# Altium PCB PCB V1.0.PcbDoc (part 1 of 2)
Units mil, origin at the board's own origin, x right, y up, seen from the top; angles counter-clockwise.
Board outline 1377.95 x 1377.95 mil, 6 copper layers (SIG/GND1, GND1, PWR, SIG/GND2, GND2, SIG/GND3), stack 60.865 mil thick; 201 components, 101 nets, 556 pads, 512 vias.
Unrouted connection lines stored in the file: 86.
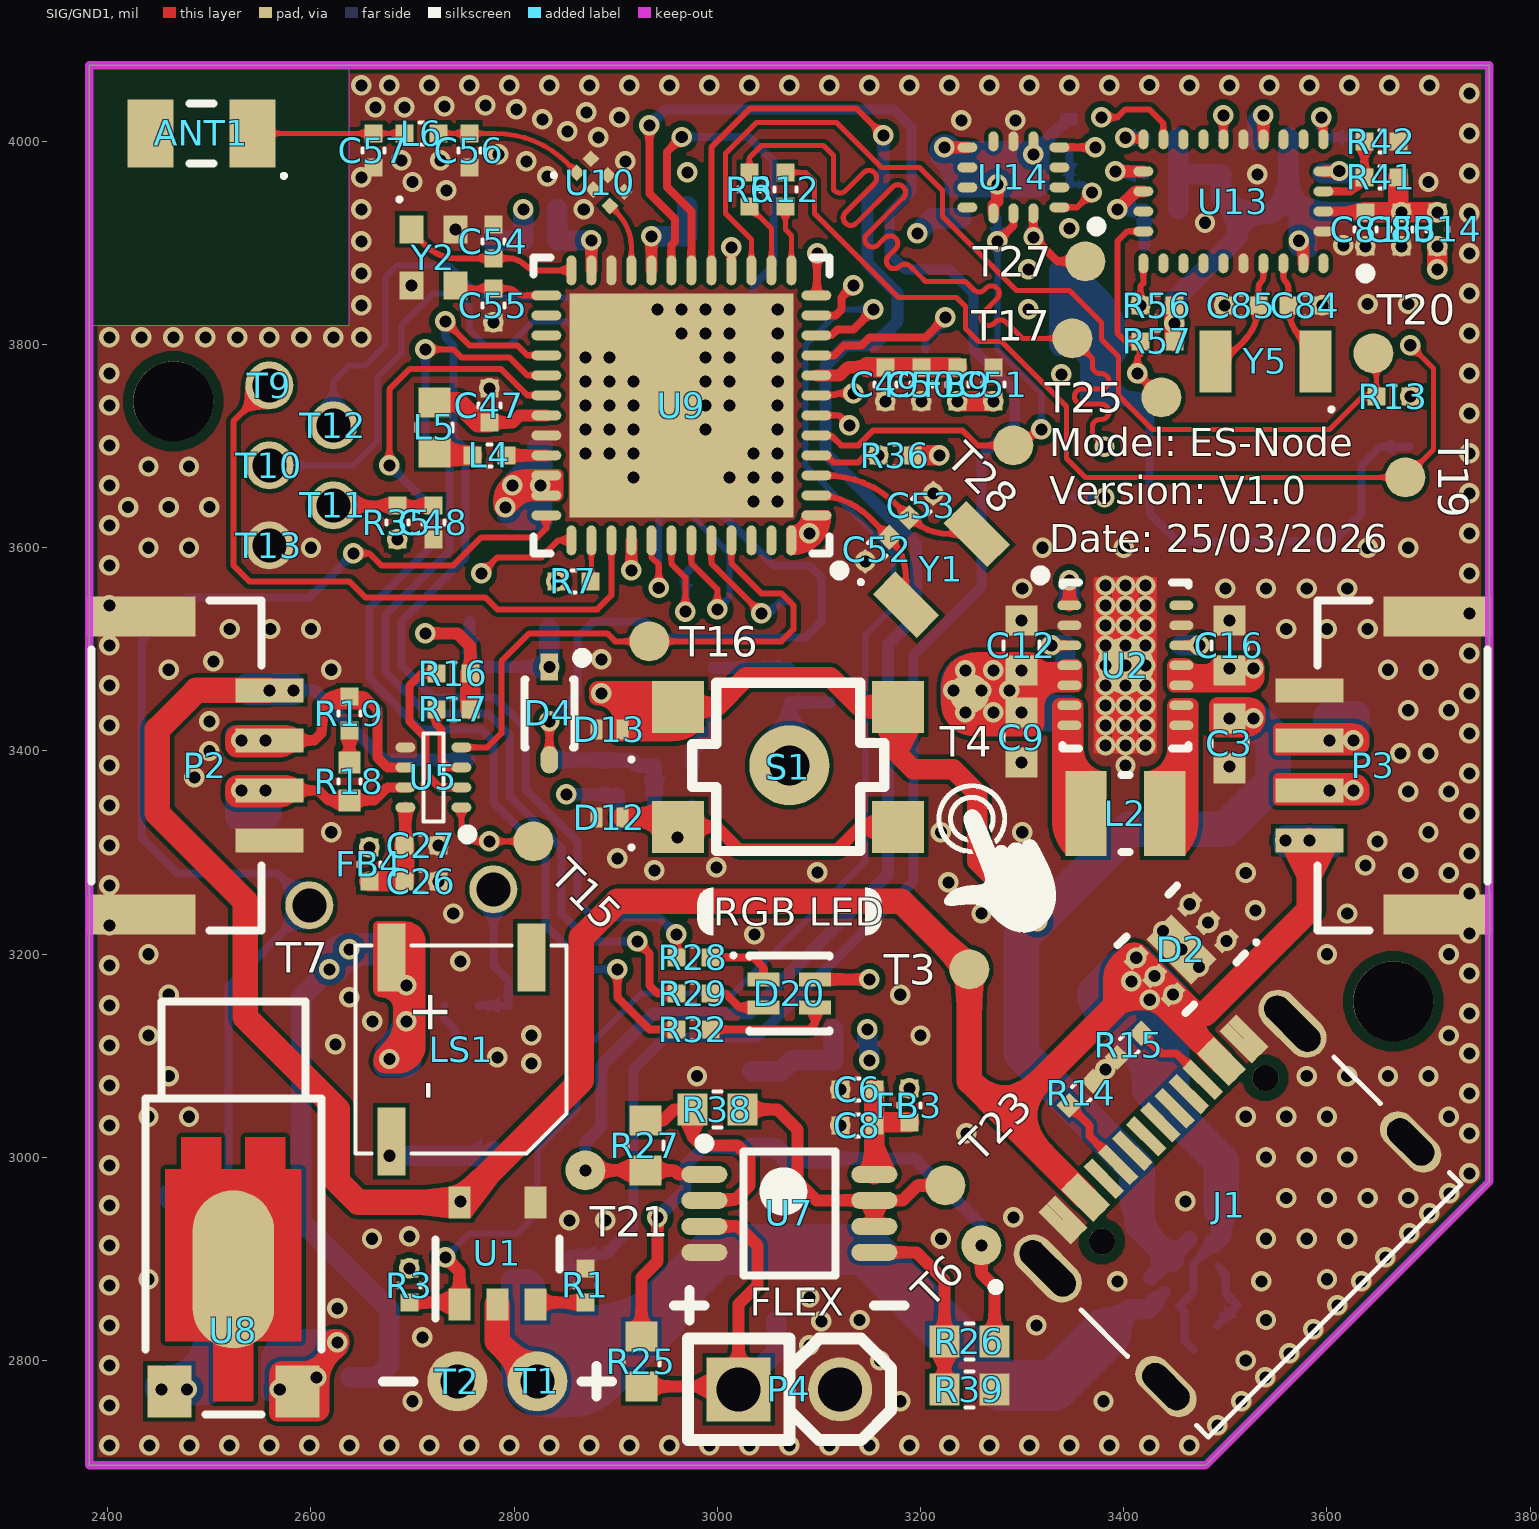
[diagram p0: SIG/GND1 view]
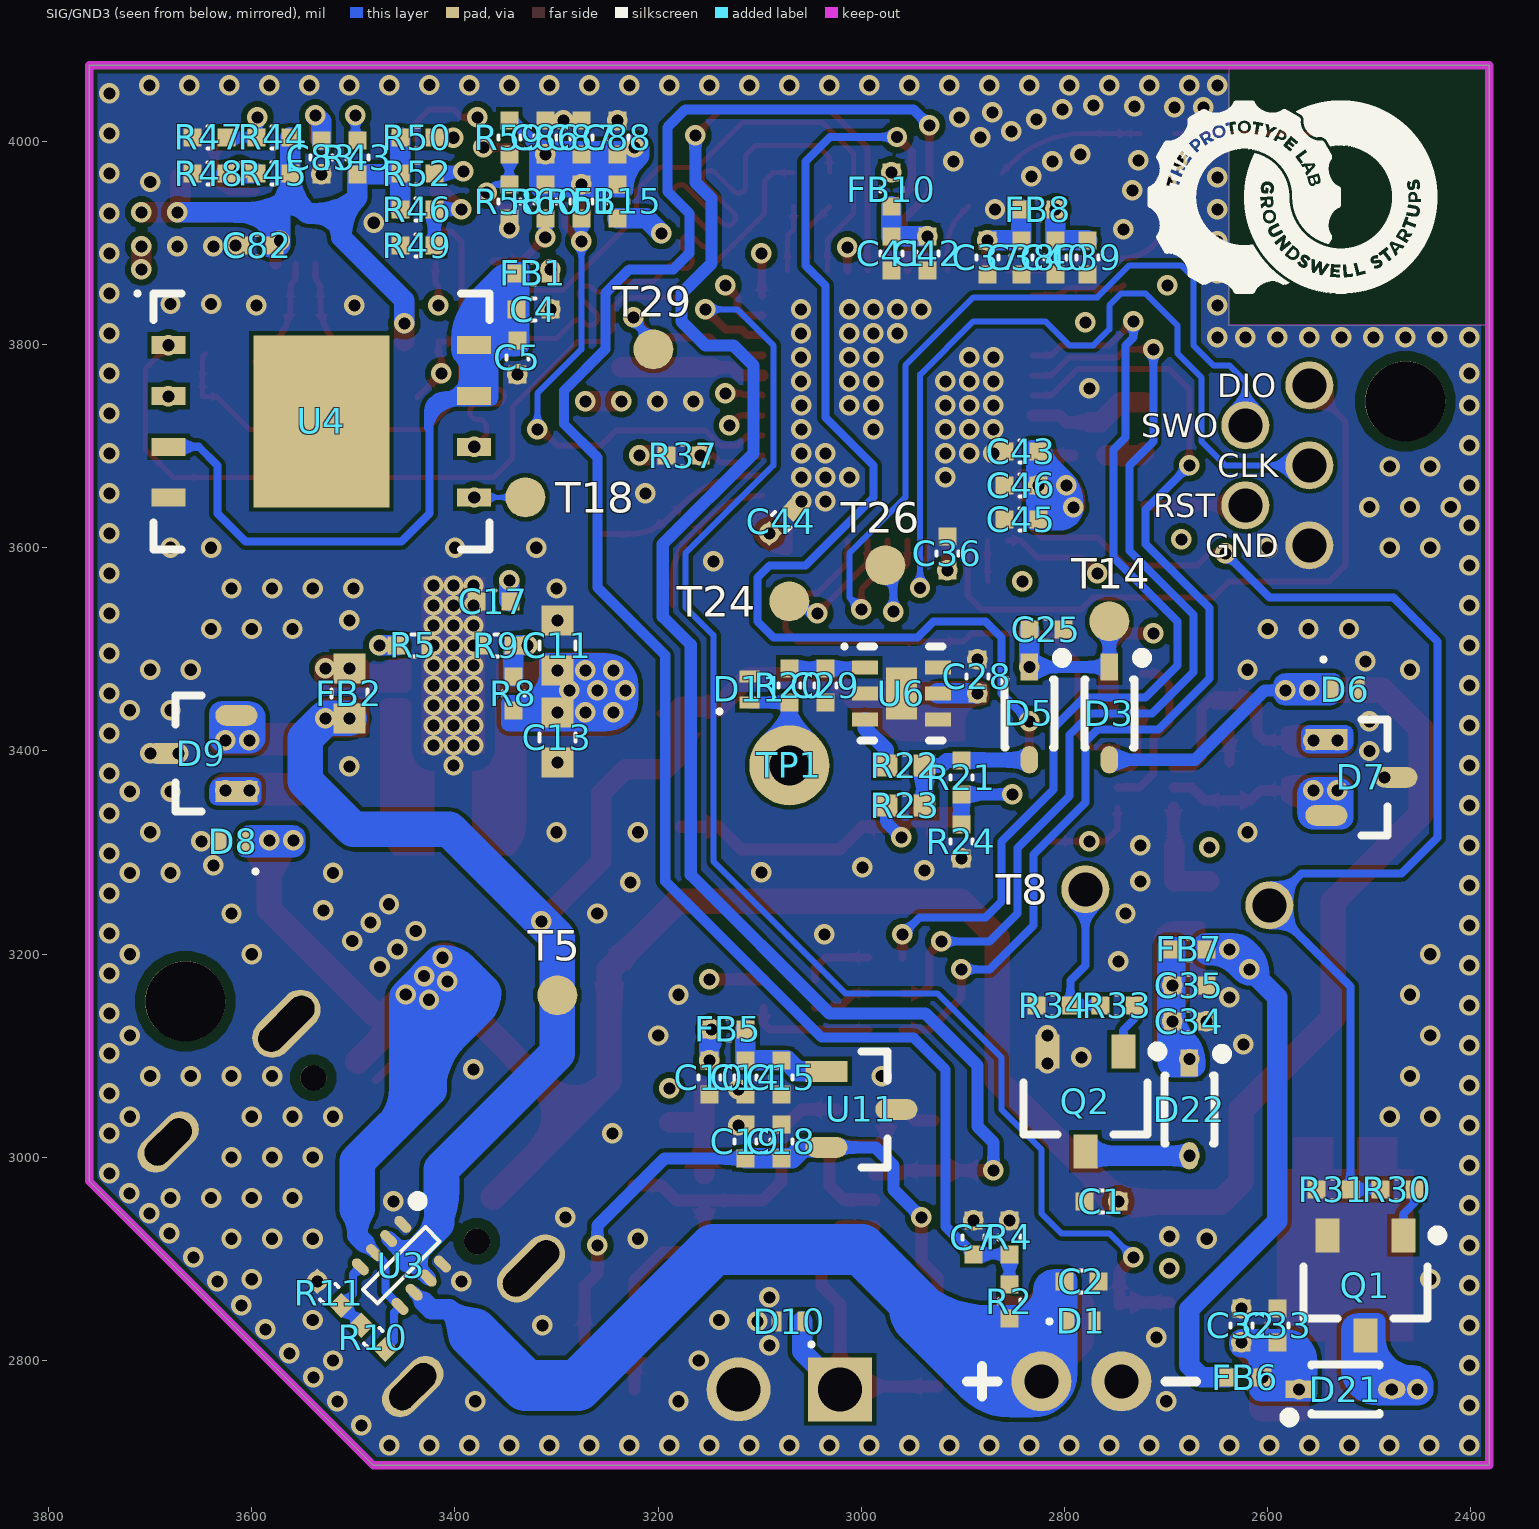
[diagram p1: SIG/GND3 view, seen from below]
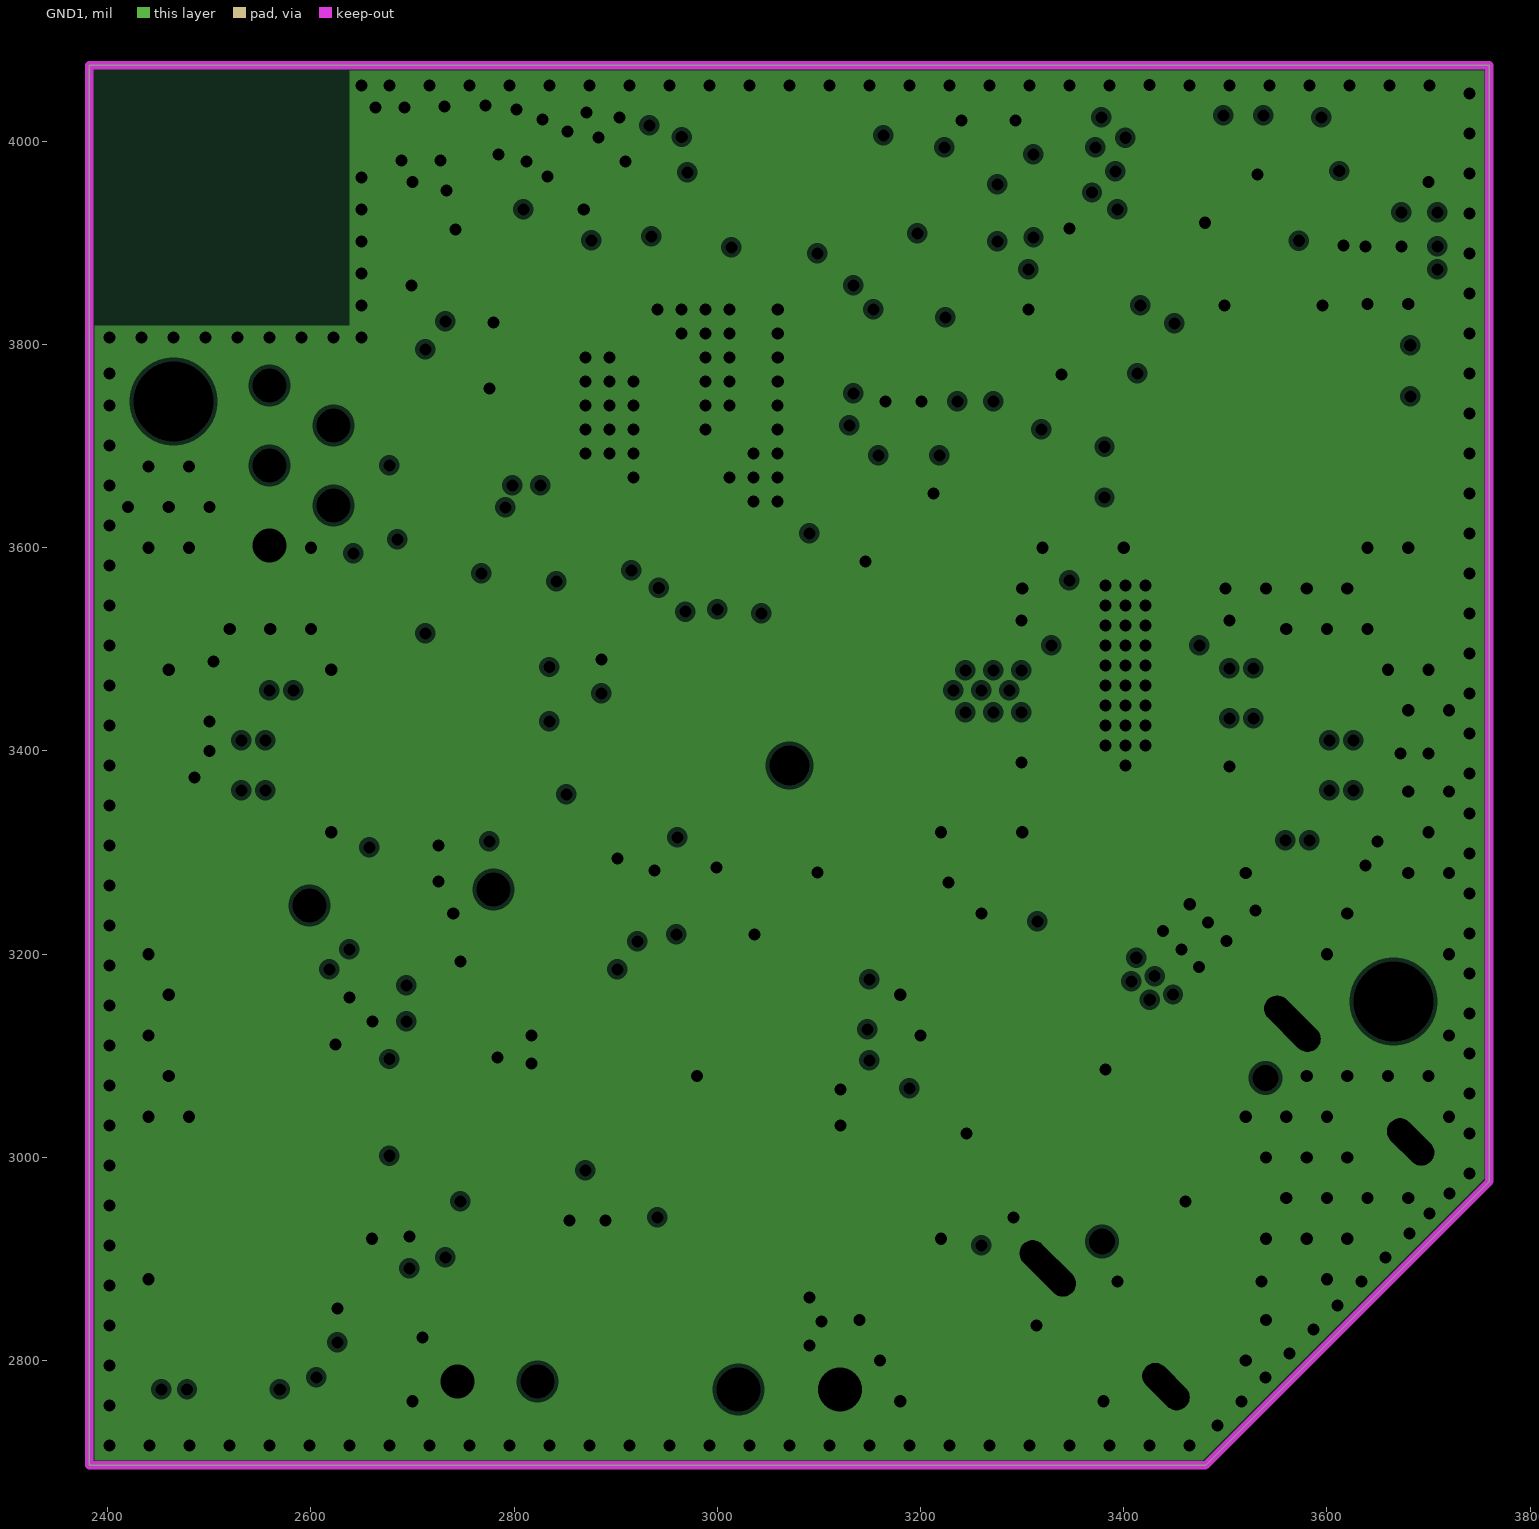
[diagram p2: GND1, clearances drawn from the general rule]
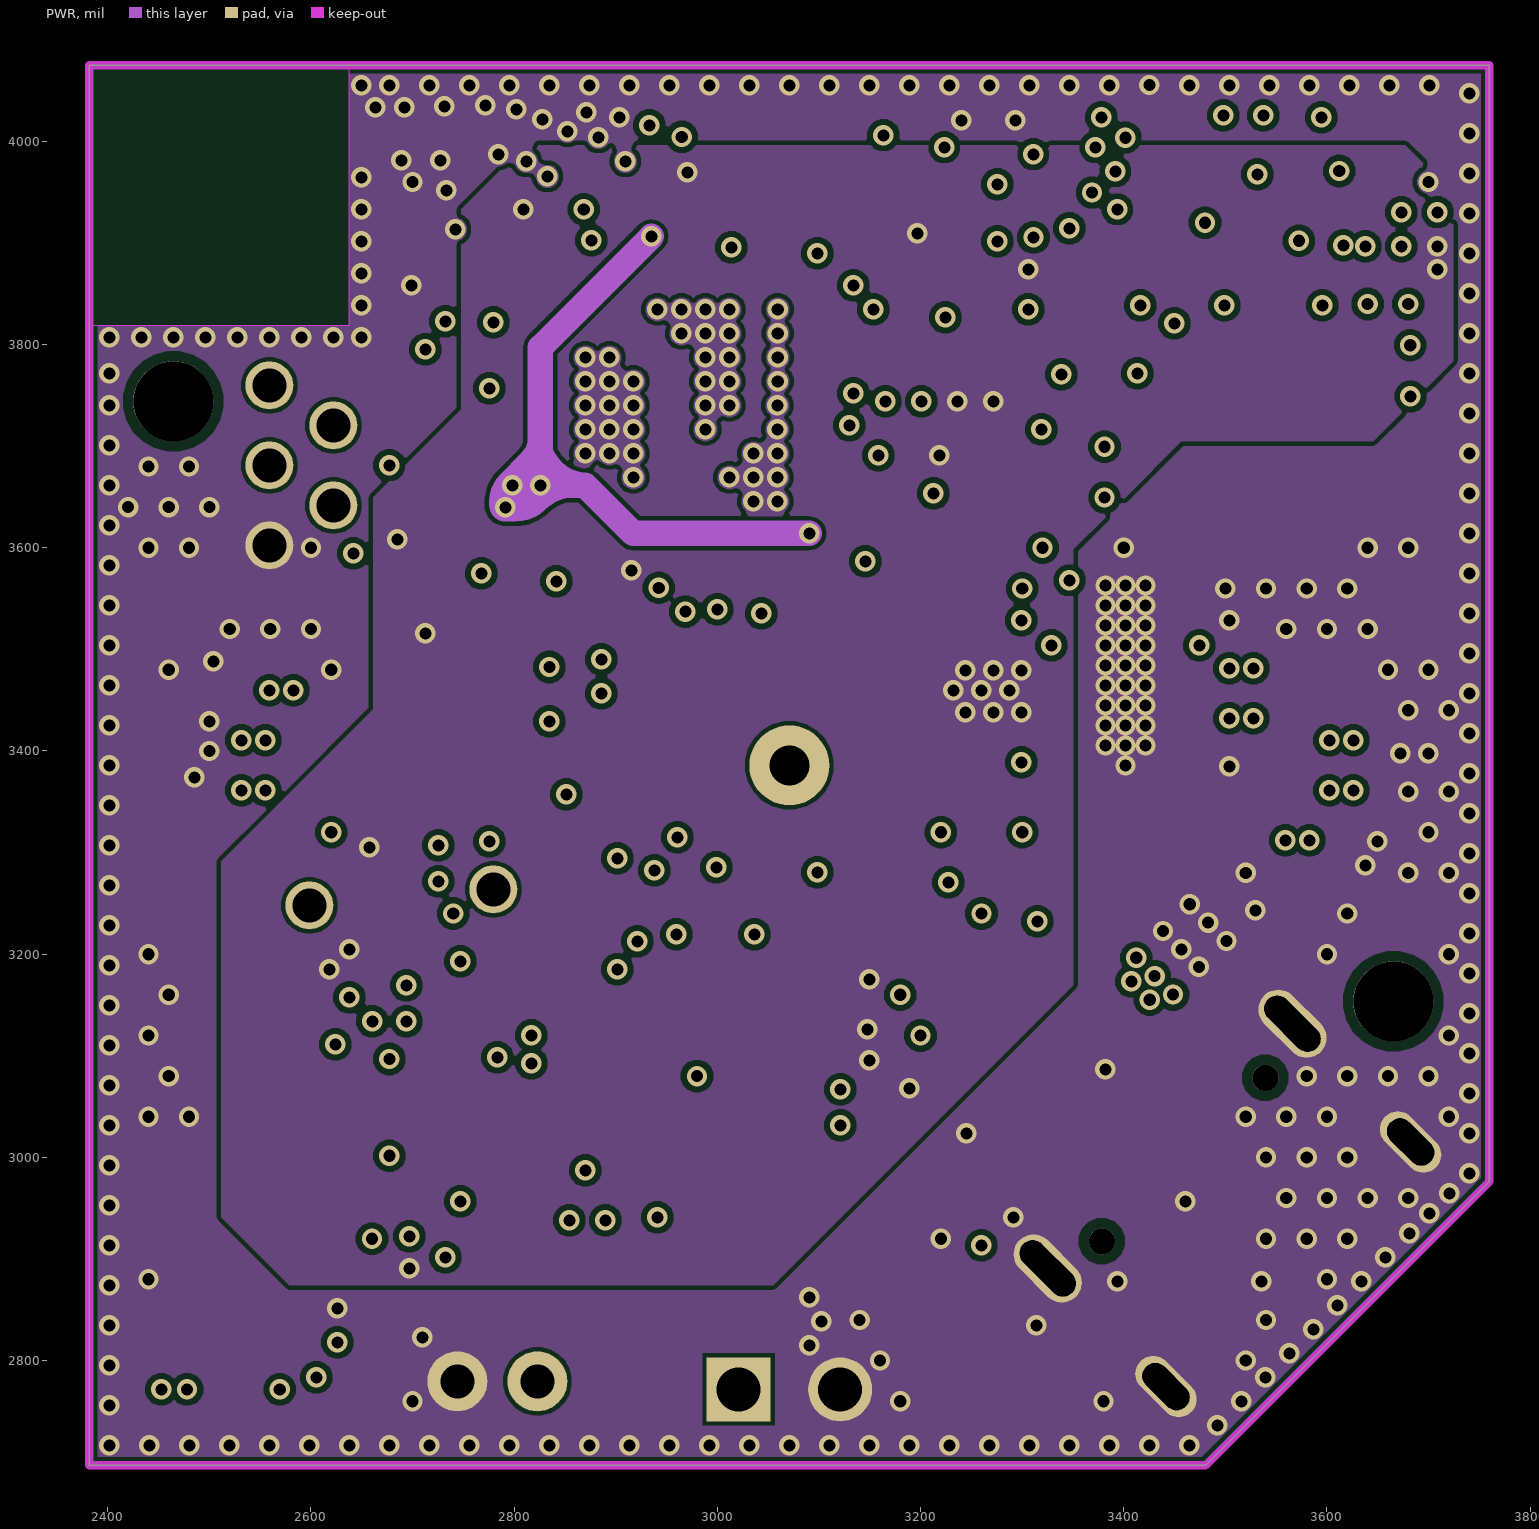
[diagram p3: PWR]
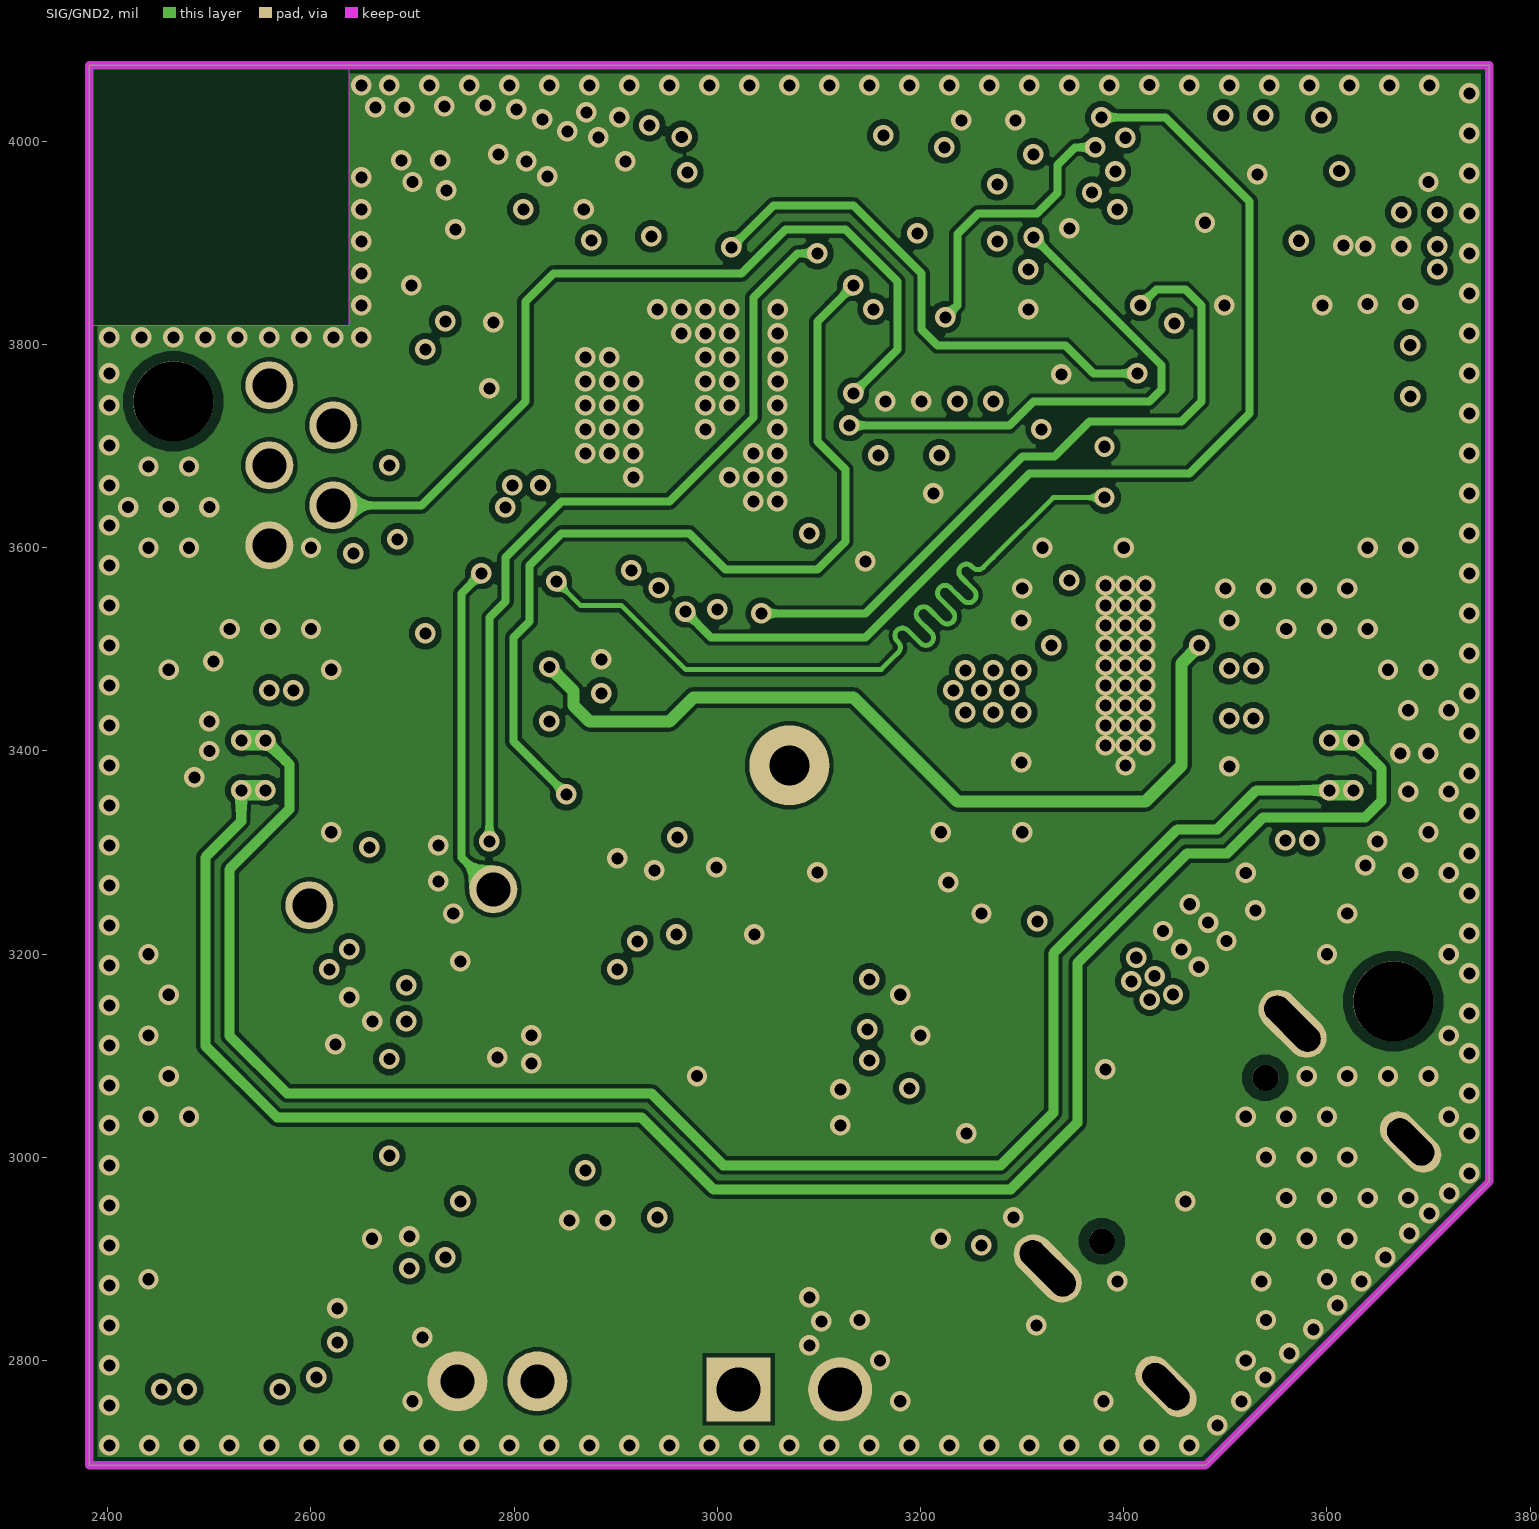
[diagram p4: SIG/GND2]
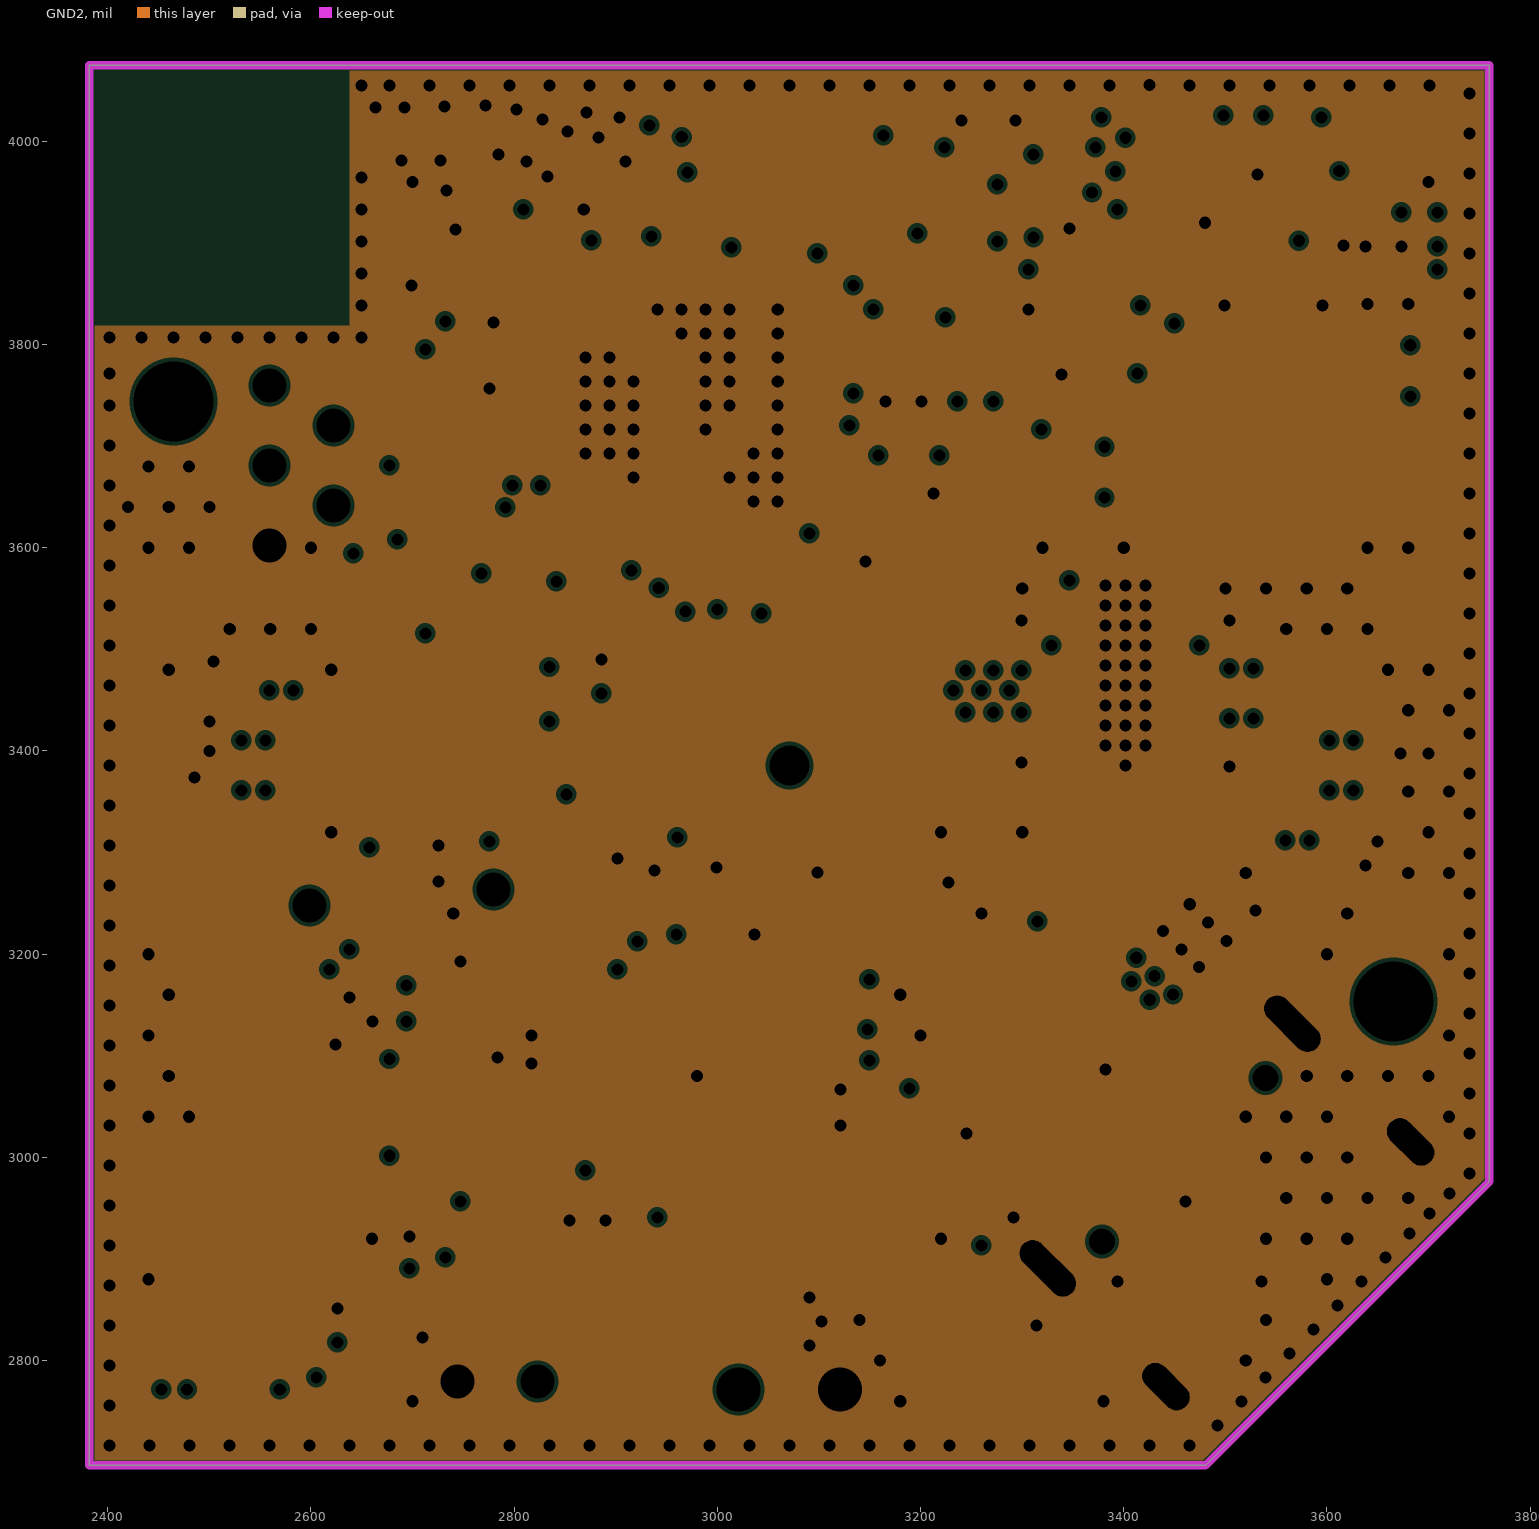
[diagram p5: GND2, clearances drawn from the general rule]
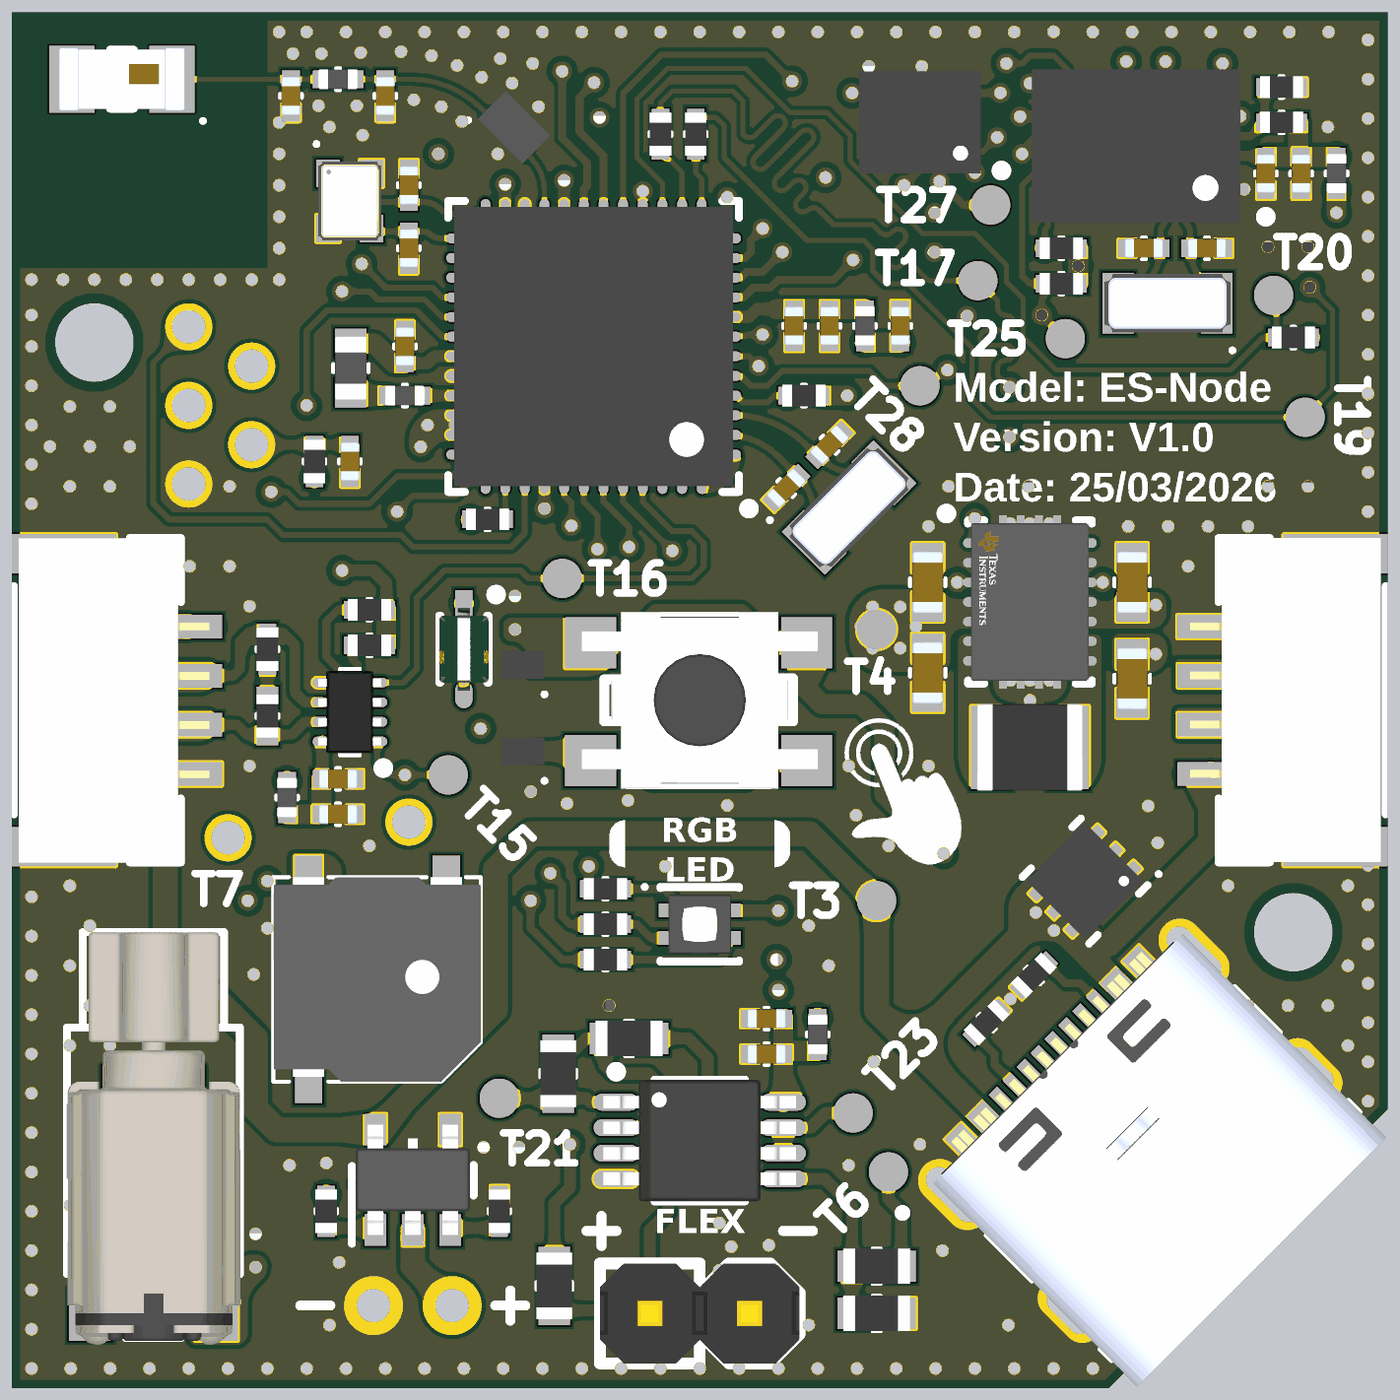
[diagram p7: 3D render of the assembled board from above, using the file's embedded part models]
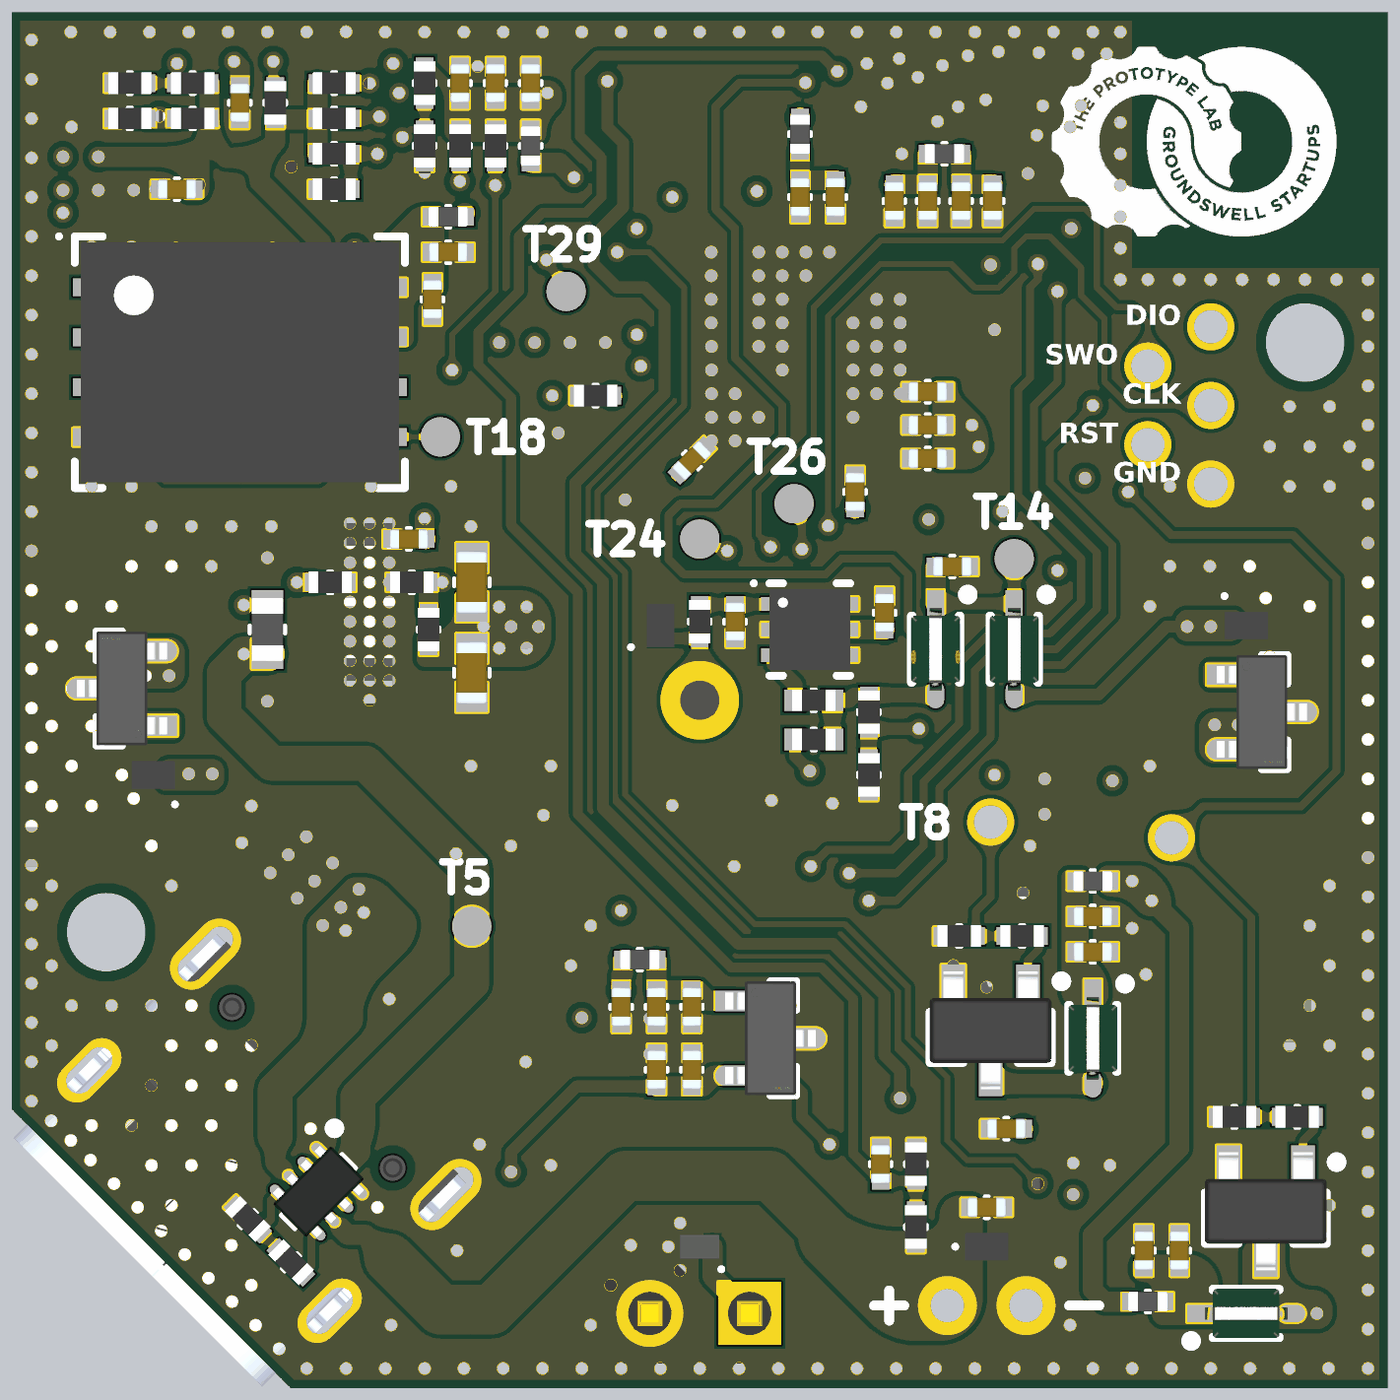
[diagram p8: 3D render of the assembled board from below, using the file's embedded part models]

## Layer stack, top to bottom
Top Solder: solder mask 1.2, Solder Resist, Dk 3.8
SIG/GND1: signal copper 1.378
Prepreg 1: prepreg 3.913, 3313*1, Dk 4.1
GND1: plane copper 0.598, net GND
Core 1: core 21.654, Core, Dk 4.6
PWR: signal copper 0.598
Prepreg 2: prepreg 4.583, 2116*1, Dk 4.16
SIG/GND2: signal copper 0.598
Core 2: core 21.654, Core, Dk 4.6
GND2: plane copper 0.598, net GND
Prepreg 3: prepreg 3.913, 3313*1, Dk 4.1
SIG/GND3: signal copper 1.378
Bottom Solder: solder mask 1.2, Solder Resist, Dk 3.8

## Board outline
2381.89,2696.85 3480.31,2696.85 3759.84,2976.38 3759.84,4074.8 2381.89,4074.8

## Design rules (kind name [scope] priority, off if disabled: settings)
BoardOutlineClearance [All] p1: gap=7.87 ignorepadtopadclearanceinfootprint=FALSE
Clearance 40V [InNetClass('HV_40V') vs Not InNetClass('HV_40V')] p1 off: gap=5.12 ignorepadtopadclearanceinfootprint=TRUE except(4: Fill-Text Poly-Text Region-Text Text-Text; 5.91: Arc-Text Track-Text SMDPad-Text THPad-Text Via-Text; 7.87: Arc-THPad Track-THPad SMDPad-THPad THPad-THPad; 9.84: SMDPad-Hole THPad-Hole Via-Hole Fill-Hole Poly-Hole Region-Hole Text-Hole; 10: Arc-Hole Track-Hole THPad-Via Via-Via)
Clearance 80V [InNetClass('100V')] p2 off: gap=9.06 ignorepadtopadclearanceinfootprint=TRUE
Clearance "General Clearence JLC" [All] p3: gap=4 ignorepadtopadclearanceinfootprint=TRUE except(3.5: Arc-Arc Arc-Track Track-Track; 5: Arc-SMDPad Arc-Via Track-SMDPad Track-Via SMDPad-SMDPad SMDPad-Via; 5.91: SMDPad-Text THPad-Text Via-Text; 7.87: Arc-THPad Track-THPad SMDPad-THPad THPad-THPad; 9.84: SMDPad-Hole THPad-Hole Via-Hole Fill-Hole Poly-Hole Region-Hole Text-Hole; 10: Arc-Hole Track-Hole THPad-Via Via-Via)
ComponentClearance [All] p1: gap=4 collisioncheckmode=3 verticalgap=4 showdistances=TRUE
DiffPairsRouting "DiffPairsRouting 90ohm" [InDifferentialPairClass('90R_diff')] p1: maxlimit=10 minlimit=5 mostfreqgap=10 toplayer_maxgap=5 toplayer_prefgap=5 toplayer_minwidth=4.84 toplayer_maxwidth=4.84 toplayer_prefwidth=4.84 bottomlayer_maxgap=5 bottomlayer_prefgap=5 bottomlayer_minwidth=4.84 bottomlayer_maxwidth=4.84 bottomlayer_prefwidth=4.84 impedanceprofiledriven=TRUE impedanceprofileid={306CB750-895A-4720-9D76-EC01B0257AFF} impedanceprofilevalue=90.000000 maxuncoupledlength=500
DiffPairsRouting "DiffPairsRouting 100ohm" [InDifferentialPairClass('120ohm_diff')] p2: maxlimit=15 minlimit=5 mostfreqgap=15 toplayer_mingap=15 toplayer_minwidth=3.52 toplayer_maxwidth=3.52 toplayer_prefwidth=3.52 bottomlayer_mingap=15 bottomlayer_minwidth=3.52 bottomlayer_maxwidth=3.52 bottomlayer_prefwidth=3.52 impedanceprofiledriven=TRUE impedanceprofileid={3A86BE7C-3B7D-46C8-BF05-D5B4A5EA3E43} impedanceprofilevalue=120.000000 maxuncoupledlength=500
Height [All] p1: minheight=0 maxheight=71497.94 prefheight=500
HoleSize [All] p1: absolutevalues=TRUE maxlimit=248.03 minlimit=11.81 maxpercent=80.000 minpercent=20.000
HoleToHoleClearance [All] p1: gap=7.87 allowstackedmicrovias=FALSE
MatchedLengths [InNetClass('50ps_SDIO')] p1: tolerance=1000 checknetsindiffpair=FALSE checkdiffpairvsdiffpair=TRUE checkxsignals=TRUE checkothers=TRUE usedelayunits=TRUE delaytolerance=50.000000
MinimumAnnularRing [All] p1: minimumring=2.5
MinimumSolderMaskSliver [All] p1: minsoldermaskwidth=3.15
PlaneClearance "High Voltage Plane Clearance" [InNetClass('HV_80V')] p1: clearance=25.2
PlaneClearance "General PlaneClearance" [All] p2: clearance=4
PlaneConnect [All] p1: planeconnectstyle=Direct reliefexpansion=11.81 reliefentries=4 reliefconductorwidth=15 reliefairgap=4
PolygonConnect [All] p1: connectstyle=Direct reliefconductorwidth=15 reliefentries=4 polygonreliefangle="90 Angle" airgapwidth=5
RoutingVias [All] p1: holewidth=12 width=20 viastyle="Through Hole" minholewidth=11.81 minwidth=19.68 maxholewidth=100 maxwidth=100
SilkToSilkClearance [All] p1: silktosilkclearance=0
SilkToSolderMaskClearance [IsPad] p1: minsilkscreentomaskgap=4 clearancetoexposedcopper=TRUE
SolderMaskExpansion [All] p1: expansion=2 istentingtop=FALSE
SupplyNets "Schematic Supply Nets_15" [InNet('2V5_Ref')] p1: voltage=0.000
SupplyNets "Schematic Supply Nets_12" [InNet('3V3_FLX')] p2: voltage=0.000
SupplyNets "Schematic Supply Nets_10" [InNet('3V3_FLASH')] p3: voltage=0.000
SupplyNets "Schematic Supply Nets_6" [InNet('3V3_ERM')] p4: voltage=0.000
SupplyNets "Schematic Supply Nets_2" [InNet('3V3_MCU2')] p5: voltage=0.000
SupplyNets "Schematic Supply Nets_17" [InNet('5V_in')] p6: voltage=0.000
SupplyNets "Schematic Supply Nets_14" [InNet('3V3_BNO')] p7: voltage=0.000
SupplyNets "Schematic Supply Nets_13" [InNet('3V3_ICM')] p8: voltage=0.000
SupplyNets "Schematic Supply Nets_11" [InNet('3V3_BZ')] p9: voltage=0.000
SupplyNets "Schematic Supply Nets_9" [InNet('3V3_RS485')] p10: voltage=0.000
SupplyNets "Schematic Supply Nets_8" [InNet('VBAT')] p11: voltage=0.000
SupplyNets "Schematic Supply Nets_7" [InNet('VBAT/5V')] p12: voltage=0.000
SupplyNets "Schematic Supply Nets_16" [InNet('GND')] p13: voltage=0.000
SupplyNets "Schematic Supply Nets_4" [InNet('3V3_main')] p14: voltage=0.000
UnRoutedNet [All] p1: checkbadconnections=TRUE
Width [InNetClass('50ohm')] p1: maxlimit=5.04 minlimit=4.84 preferedwidth=5.04 toplayer_minwidth=5.04 midlayer1_maxwidth=4.84 midlayer1_prefwidth=4.84 midlayer2_maxwidth=4.84 midlayer2_prefwidth=4.84 bottomlayer_minwidth=5.04 impedanceprofiledriven=TRUE impedanceprofileid={0088AE64-557E-4D86-AE8B-A0C06BEEBC35} impedanceprofilevalue=50.000000 minimp=50.000000 maximp=50.000000 favimp=50.000000
Width General [All] p2: maxlimit=100 minlimit=3.5 preferedwidth=5
19 further rules are at their usual default settings.

## Classes and differential pairs
net class 50ps_SDIO: FLASH_CLK_1 FLASH_CS_1 FLASH_DI_1 FLASH_DO
net class 50ohm: FLASH_CLK FLASH_CLK_1 FLASH_CS FLASH_CS_1 FLASH_DI FLASH_DI_1 FLASH_DO FLASH_DO_1 MCU2_ANT NetANT1_1 NetC56_1
component class "U_STM32WB55 Sensor MCU": ANT1 C36 C37 C38 C39 C40 C41 C42 C43 C44 C45 C46 C47 C48 C49 C50 C51 C52 C53 C54 C55 C56 C57 FB8 FB9 FB10 L4 L5 L6 R35 R36 R37 T9 T10 T11 T12 T13 U9 U10 Y1 Y2
component class "U_RS485 Com and Connectors": C26 C27 D6 D7 D8 D9 FB4 P2 P3 R16 R17 R18 R19 T15 T16 U5
component class "U_Power Supply Section": C1 C2 C3 C7 C9 C10 C11 C12 C13 C14 C15 C16 C17 C18 C19 C25 D1 D2 D3 D4 D5 FB2 FB5 J1 L2 R1 R2 R3 R4 R5 R8 R9 R10 R11 R14 R15 T1 T2 T3 T4 T5 T6 T14 U1 U2 U3 U11
component class U_Peripheral: 45 C4 C5 C6 C8 C28 C29 C32 C33 C34 C35 D10 D11 D12 D13 D20 D21 D22 FB1 FB3 FB6 FB7 LS1 P4 Q1 Q2 R6 R7 R12 R13 R20 R21 R22 R23 R24 R25 R26 R27 R28 R29 R30 R31 R32 R33 R34 R38 R39 S1 T7 T8 T17 T18 T19 T20 T21 T23 TP1 U4 U6 U7 U8
component class "U_IMU Section": C80 C81 C82 C83 C84 C85 C86 C87 C88 FB14 FB15 R41 R42 R43 R44 R45 R46 R47 R48 R49 R50 R52 R56 R57 R58 R59 R60 R61 T24 T25 T26 T27 T28 T29 U13 U14 Y5

## Components (designator, comment, footprint, x,y, rotation, side; value= is the part's Value field where it differs from the comment)
ANT1 "2450AT18B100E" "2450AT18B100E IPC-C" 2492.12,4007.88 r180 top
C1 "10uF 10V 0402 X5R" "0402 IPC CLASS C CAPACITOR" 2763.78,2956.69 r180 bottom
C2 "10uF 10V 0402 X5R" "0402 IPC CLASS C CAPACITOR" 2783.46,2877.95 r0 bottom
C3 "22uF 10V 0603 X5R" "0603 IPC CLASS C CAPACITOR" 3503.94,3407.48 r270 top
C4 "10uF 10V 0402 X5R" "0402 IPC CLASS C CAPACITOR" 3322.83,3834.65 r180 bottom
C5 "100nF 50V 0402 X7R" "0402 IPC CLASS C CAPACITOR" 3338.58,3787.4 r270 bottom
C6 "10uF 10V 0402 X5R" "0402 IPC CLASS C CAPACITOR" 3137.8,3066.93 r180 top
C7 "100nF 50V 0402 X7R" "0402 IPC CLASS C CAPACITOR" 2889.76,2921.26 r90 bottom
C8 "100nF 50V 0402 X7R" "0402 IPC CLASS C CAPACITOR" 3137.8,3031.5 r180 top
C9 "22uF 10V 0603 X5R" "0603 IPC CLASS C CAPACITOR" 3299.21,3413.39 r270 top
C10 "100nF 50V 0402 X7R" "0402 IPC CLASS C CAPACITOR" 3149.61,3078.74 r90 bottom
C11 "22uF 10V 0603 X5R" "0603 IPC CLASS C CAPACITOR" 3299.21,3503.94 r90 bottom
C12 "22uF 10V 0603 X5R" "0603 IPC CLASS C CAPACITOR" 3299.21,3503.94 r90 top
C13 "22uF 10V 0603 X5R" "0603 IPC CLASS C CAPACITOR" 3299.21,3413.39 r270 bottom
C14 "10uF 10V 0402 X5R" "0402 IPC CLASS C CAPACITOR" 3114.17,3078.74 r270 bottom
C15 "100nF 50V 0402 X7R" "0402 IPC CLASS C CAPACITOR" 3078.74,3078.74 r90 bottom
C16 "22uF 10V 0603 X5R" "0603 IPC CLASS C CAPACITOR" 3503.94,3503.94 r90 top
C17 "100nF 50V 0402 X7R" "0402 IPC CLASS C CAPACITOR" 3362.2,3547.24 r0 bottom
C18 "100nF 50V 0402 X7R" "0402 IPC CLASS C CAPACITOR" 3078.74,3015.75 r270 bottom
C19 "10uF 10V 0402 X5R" "0402 IPC CLASS C CAPACITOR" 3114.17,3015.75 r90 bottom
C25 "10uF 10V 0402 X5R" "0402 IPC CLASS C CAPACITOR" 2817.91,3519.68 r0 bottom
C26 "10uF 10V 0402 X5R" "0402 IPC CLASS C CAPACITOR" 2708.66,3271.65 r0 top
C27 "100nF 50V 0402 X7R" "0402 IPC CLASS C CAPACITOR" 2708.66,3307.09 r0 top
C28 "100nF 50V 0402 X7R" "0402 IPC CLASS C CAPACITOR" 2885.83,3473.43 r90 bottom
C29 "DNP 0402" "0402 IPC Class C Capacitor" 3035.43,3464.57 r270 bottom
C32 "10uF 10V 0402 X5R" "0402 IPC CLASS C CAPACITOR" 2625.98,2834.65 r90 bottom
C33 "100nF 50V 0402 X7R" "0402 IPC CLASS C CAPACITOR" 2590.55,2834.65 r90 bottom
C34 "10uF 10V 0402 X5R" "0402 IPC CLASS C CAPACITOR" 2677.17,3133.86 r180 bottom
C35 "100nF 50V 0402 X7R" "0402 IPC CLASS C CAPACITOR" 2677.17,3169.29 r180 bottom
C36 "100nF 50V 0402 X7R" "0402 IPC CLASS C CAPACITOR" 2915.35,3594.49 r90 bottom
C37 "100pF 50V 0402 C0G" "0402 IPC CLASS C CAPACITOR" 2875.98,3885.83 r270 bottom
C38 "100nF 50V 0402 X7R" "0402 IPC CLASS C CAPACITOR" 2842.52,3885.83 r270 bottom
C39 "100nF 50V 0402 X7R" "0402 IPC CLASS C CAPACITOR" 2777.56,3885.83 r270 bottom
C40 "100pF 50V 0402 C0G" "0402 IPC CLASS C CAPACITOR" 2809.05,3885.83 r270 bottom
C41 "10uF 10V 0402 X5R" "0402 IPC CLASS C CAPACITOR" 2970.47,3889.76 r270 bottom
C42 "100nF 50V 0402 X7R" "0402 IPC CLASS C CAPACITOR" 2935.04,3889.76 r270 bottom
C43 "100nF 50V 0402 X7R" "0402 IPC CLASS C CAPACITOR" 2842.52,3694.88 r0 bottom
C44 "100nF 50V 0402 X7R" "0402 IPC CLASS C CAPACITOR" 3078.74,3625.99 r135 bottom
C45 "4.7uF 10V 0402 X5R" "0402 IPC CLASS C CAPACITOR" 2842.52,3627.95 r0 bottom
C46 "100nF 50V 0402 X7R" "0402 IPC CLASS C CAPACITOR" 2842.52,3661.42 r0 bottom
C47 "4.7uF 10V 0402 X5R" "0402 IPC CLASS C CAPACITOR" 2775.59,3740.16 r90 top
C48 "100nF 50V 0402 X7R" "0402 IPC CLASS C CAPACITOR" 2720.47,3625 r270 top
C49 "100nF 50V 0402 X7R" "0402 IPC CLASS C CAPACITOR" 3165.35,3760.83 r270 top
C50 "10uF 10V 0402 X5R" "0402 IPC CLASS C CAPACITOR" 3200.79,3760.83 r270 top
C51 "10uF 10V 0402 X5R" "0402 IPC CLASS C CAPACITOR" 3271.65,3760.83 r90 top
C52 "15pF 50V 0402 C0G" "0402 IPC CLASS C CAPACITOR" 3157.48,3598.43 r225 top
C53 "15pF 50V 0402 C0G" "0402 IPC CLASS C CAPACITOR" 3200.79,3641.73 r45 top
C54 "6pF 50V 0402 C0G" "0402 IPC CLASS C CAPACITOR" 2779.53,3901.58 r90 top
C55 "6pF 50V 0402 C0G" "0402 IPC CLASS C CAPACITOR" 2779.53,3838.58 r270 top
C56 "DNP 0402" "0402 IPC CLASS C CAPACITOR" 2755.9,3991.14 r270 top
C57 "DNP 0402" "0402 IPC CLASS C CAPACITOR" 2661.42,3991.14 r270 top
C80 "10uF 10V 0402 X5R" "0402 IPC CLASS C CAPACITOR" 3673.23,3913.39 r270 top
C81 "100nF 50V 0402 X7R" "0402 IPC CLASS C CAPACITOR" 3637.8,3913.39 r270 top
C82 "100nF 50V 0402 X7R" "0402 IPC CLASS C CAPACITOR" 3594.49,3897.64 r0 bottom
C83 "100nF 50V 0402 X7R" "0402 IPC CLASS C CAPACITOR" 3531.5,3984.25 r270 bottom
C84 "15pF 50V 0402 C0G" "0402 IPC CLASS C CAPACITOR" 3578.74,3838.58 r0 top
C85 "15pF 50V 0402 C0G" "0402 IPC CLASS C CAPACITOR" 3515.75,3838.58 r180 top
C86 "100nF 50V 0402 X7R" "0402 IPC CLASS C CAPACITOR" 3311.02,4003.94 r90 bottom
C87 "100nF 50V 0402 X7R" "0402 IPC CLASS C CAPACITOR" 3275.59,4003.94 r90 bottom
C88 "10uF 10V 0402 X5R" "0402 IPC CLASS C CAPACITOR" 3240.16,4003.94 r90 bottom
D1 "SP3031-01ETG" "SOD882 IPC-C" 2783.46,2838.58 r180 bottom
D2 "TVS0500DRVR" "DRV0006A IPC-C" 3456.69,3204.72 r225 top
D3 "1N5819WS" "SOD-323 IPC-C" 2755.91,3437.01 r270 bottom
D4 "1N5819WS" "SOD-323 IPC-C" 2834.65,3437.01 r270 top
D5 "1N5819WS" "SOD-323 IPC-C" 2834.65,3437.01 r270 bottom
D6 "SP3031-01ETG" "SOD882 IPC-C" 2523.62,3460.63 r180 bottom
D7 "SM712" FP-SOT23-IPC_C 2507.87,3374.02 r180 bottom
D8 "SP3031-01ETG" "SOD882 IPC-C" 3618.11,3311.02 r0 bottom
D9 "SM712" FP-SOT23-IPC_C 3649.61,3397.64 r0 bottom
D10 "ESD351DPYR" "DPY0002A IPC-C" 3070.87,2838.58 r0 bottom
D11 "SP3031-01ETG" "SOD882 IPC-C" 3110.24,3460.63 r90 bottom
D12 "SP3031-01ETG" "SOD882 IPC-C" 2893.7,3334.65 r180 top
D13 "SP3031-01ETG" "SOD882 IPC-C" 2893.7,3421.26 r180 top
D20 "RGB LED" "NH-B1515RGBA-HF IPC-C" 3070.87,3161.42 r0 top
D21 "1N5819WS" "SOD-323 IPC-C" 2523.62,2771.65 r180 bottom
D22 "1N5819WS" "SOD-323 IPC-C" 2677.17,3047.24 r270 bottom
FB1 "BLM15AX102SN1D" "0402 IPC CLASS C FERRITE BEAD" 3322.83,3870.08 r0 bottom
FB2 "BLM21SP111SN1D" "0603 IPC CLASS C FERRITE BEAD" 3503.94,3456.69 r90 bottom
FB3 "BLM15AX102SN1D" "0402 IPC CLASS C FERRITE BEAD" 3188.98,3051.18 r270 top
FB4 "BLM15AX102SN1D" "0402 IPC CLASS C FERRITE BEAD" 2657.48,3288.39 r270 top
FB5 "BLM15AX102SN1D" "0402 IPC CLASS C FERRITE BEAD" 3130.91,3125.98 r180 bottom
FB6 "BLM15AX102SN1D" "0402 IPC CLASS C FERRITE BEAD" 2622.05,2783.46 r180 bottom
FB7 "BLM15AX102SN1D" "0402 IPC CLASS C FERRITE BEAD" 2677.17,3204.72 r0 bottom
FB8 "BLM15AX102SN1D" "0402 IPC CLASS C FERRITE BEAD" 2825.79,3933.07 r180 bottom
FB9 "BLM15AX102SN1D" "0402 IPC CLASS C FERRITE BEAD" 3236.22,3760.83 r270 top
FB10 "BLM15AX102SN1D" "0402 IPC CLASS C FERRITE BEAD" 2970.47,3952.76 r270 bottom
FB14 "BLM15AX102SN1D" "0402 IPC CLASS C FERRITE BEAD" 3708.66,3913.39 r90 top
FB15 "BLM15AX102SN1D" "0402 IPC CLASS C FERRITE BEAD" 3240.16,3940.94 r270 bottom
J1 "TYPEC-304J-BCP16" VALCON_CSP-USC16-TR 3429.13,3027.56 r45 top
L2 "1uH 3.3A 1008" "1008 Inductor IPC-C" 3401.57,3338.58 r0 top
L4 "10nF 300mA 0402" "0402 IPC CLASS C FERRITE BEAD" 2775.59,3690.95 r0 top
L5 "10uH 400mA 0603" "0603 IPC CLASS C INDUCTOR" 2721.46,3718.5 r270 top
L6 "0R 0402" "0402 IPC CLASS C FERRITE BEAD" 2708.66,4007.88 r180 top
LS1 "SMD BUZZER" MLT-5020 2748.03,3106.3 r270 top
P2 "JST-GH-04P-RA" JST-GH-04P-RA 2551.18,3385.83 r270 top locked
P3 "JST-GH-04P-RA" JST-GH-04P-RA 3590.55,3385.83 r90 top locked
P4 "1X2P 2.54mm Male Header" "2P 2.54mm Open Header" 3070.87,2771.65 r0 top
Q1 "AO3400A" "SOT-23 IPC-C" 2503.94,2874.02 r270 bottom
Q2 "AO3400A" "SOT-23 IPC-C" 2779.53,3055.12 r270 bottom
R1 "2K 0402" "0402 IPC CLASS C RESISTOR" 2870.08,2874.02 r90 top
R2 "137k 0402" "0402 IPC CLASS C RESISTOR" 2854.33,2858.27 r270 bottom
R3 "137K 0402" "0402 IPC CLASS C RESISTOR" 2696.85,2874.02 r270 top
R4 "137k 0402" "0402 IPC CLASS C RESISTOR" 2854.33,2921.26 r270 bottom
R5 "137k 0402" "0402 IPC CLASS C RESISTOR" 3440.94,3503.94 r180 bottom
R6 "22R 0402" "0402 IPC CLASS C RESISTOR" 3031.5,3952.76 r90 top
R7 "22R 0402" "0402 IPC CLASS C RESISTOR" 2858.27,3566.93 r180 top
R8 "768k 0402" "0402 IPC CLASS C RESISTOR" 3342.52,3456.69 r90 bottom
R9 "137k 0402" "0402 IPC CLASS C RESISTOR" 3359.25,3503.94 r180 bottom
R10 "30.9K 0402" "0402 IPC CLASS C RESISTOR" 3480.32,2822.83 r225 bottom
R11 "10k 0402" "0402 IPC CLASS C RESISTOR" 3523.62,2866.14 r225 bottom
R12 "22R 0402" "0402 IPC CLASS C RESISTOR" 3066.93,3952.76 r90 top
R13 "22R 0402" "0402 IPC CLASS C RESISTOR" 3665.35,3749.02 r0 top
R14 "5.1K 0402" "0402 IPC CLASS C RESISTOR" 3358.27,3062.99 r225 top
R15 "5.1K 0402" "0402 IPC CLASS C RESISTOR" 3405.51,3110.24 r45 top
R16 "10k 0402" "0402 IPC CLASS C RESISTOR" 2740.16,3476.38 r0 top
R17 "10k 0402" "0402 IPC CLASS C RESISTOR" 2740.16,3440.94 r0 top
R18 "0R 0402" "0402 IPC CLASS B RESISTOR" 2637.8,3370.08 r270 top
R19 "120R 0402" "0402 IPC CLASS C RESISTOR" 2637.8,3437.01 r270 top
R20 "2K 0402" "0402 IPC CLASS C RESISTOR" 3070.87,3464.57 r270 bottom
R21 "5.1K 0402" "0402 IPC CLASS C RESISTOR" 2901.57,3374.02 r90 bottom
R22 "0R 0402" "0402 IPC CLASS B RESISTOR" 2956.69,3385.83 r180 bottom
R23 "DNP 0402" "0402 IPC CLASS B RESISTOR" 2956.69,3346.46 r0 bottom
R24 "10k 0402" "0402 IPC CLASS C RESISTOR" 2901.57,3311.02 r270 bottom
R25 "20K 0.1% 0603" "0603 IPC CLASS C RESISTOR" 2925.2,2799.21 r90 top
R26 "20K 0.1% 0603" "0603 IPC CLASS C RESISTOR" 3248.03,2818.9 r0 top
R27 "20K 0.1% 0603" "0603 IPC CLASS C RESISTOR" 2929.13,3011.81 r90 top
R28 "1K 0402" "0402 IPC CLASS C RESISTOR" 2976.38,3196.85 r0 top
R29 "1K 0402" "0402 IPC CLASS C RESISTOR" 2976.38,3161.42 r180 top
R30 "5.1K 0402" "0402 IPC CLASS C RESISTOR" 2472.44,2968.5 r180 bottom
R31 "10k 0402" "0402 IPC CLASS C RESISTOR" 2535.43,2968.5 r180 bottom
R32 "1K 0402" "0402 IPC CLASS C RESISTOR" 2976.38,3125.98 r180 top
R33 "5.1K 0402" "0402 IPC CLASS C RESISTOR" 2748.03,3149.61 r180 bottom
R34 "10k 0402" "0402 IPC CLASS C RESISTOR" 2811.02,3149.61 r180 bottom
R35 "10k 0402" "0402 IPC CLASS C RESISTOR" 2685.04,3625 r270 top
R36 "DNP 0402" "0402 IPC CLASS C RESISTOR" 3175.2,3690.95 r0 top
R37 "10k 0402" "0402 IPC CLASS C RESISTOR" 3175.2,3690.95 r180 bottom
R38 "10K 0.1% 0603" "0603 IPC CLASS C RESISTOR" 3000,3047.24 r180 top
R39 "10K 0.1% 0603" "0603 IPC CLASS C RESISTOR" 3248.03,2771.65 r180 top
R41 "10k 0402" "0402 IPC CLASS C RESISTOR" 3653.54,3964.57 r180 top
R42 "DNP 0402" "0402 IPC CLASS C RESISTOR" 3653.54,4000 r180 top
R43 "10k 0402" "0402 IPC CLASS C RESISTOR" 3496.06,3984.25 r270 bottom
R44 "DNP 0402" "0402 IPC CLASS C RESISTOR" 3578.74,4003.94 r180 bottom
R45 "DNP 0402" "0402 IPC CLASS C RESISTOR" 3578.74,3968.5 r180 bottom
R46 "10k 0402" "0402 IPC CLASS C RESISTOR" 3437.01,3933.07 r0 bottom
R47 "10k 0402" "0402 IPC CLASS C RESISTOR" 3641.73,4003.94 r180 bottom
R48 "10k 0402" "0402 IPC CLASS C RESISTOR" 3641.73,3968.5 r180 bottom
R49 "DNP 0402" "0402 IPC CLASS C RESISTOR" 3437.01,3897.64 r180 bottom
R50 "2.43K 0402" "0402 IPC CLASS C RESISTOR" 3437.01,4003.94 r0 bottom
R52 "2.43K 0402" "0402 IPC CLASS C RESISTOR" 3437.01,3968.5 r0 bottom
R56 "2.43K 0402" "0402 IPC CLASS C RESISTOR" 3433.07,3838.58 r180 top
R57 "2.43K 0402" "0402 IPC CLASS C RESISTOR" 3433.07,3803.15 r180 top
R58 "DNP 0402" "0402 IPC CLASS C RESISTOR" 3346.46,3940.94 r270 bottom
R59 "10k 0402" "0402 IPC CLASS C RESISTOR" 3346.46,4003.94 r270 bottom
R60 "5.1K 0402" "0402 IPC CLASS C RESISTOR" 3311.02,3940.94 r270 bottom
R61 "5.1K 0402" "0402 IPC CLASS C RESISTOR" 3275.59,3940.94 r270 bottom
S1 "TS-1109S-C-D" TS-1127-C 3070.87,3385.83 r0 top
T1 "Test Point TH" "Test Point TH"#1 2822.83,2779.53 r0 top
T2 "Test Point TH" "Test Point TH"#1 2744.09,2779.53 r0 top
T3 "TP" Testpoint1 3248.03,3185.04 r0 top
T4 "TP" Testpoint1 3248.03,3456.69 r0 top
T5 "TP" Testpoint1 3299.21,3159.45 r180 bottom
T6 "TP" Testpoint1 3259.84,2913.39 r0 top
T7 "" "Test Point TH"#2 2598.43,3248.03 r0 top
T8 "" "Test Point TH"#2 2779.53,3263.78 r180 bottom
T9 "Test Point TH" "Test Point TH"#2 2559.05,3759.84 r180 top
T10 "Test Point TH" "Test Point TH"#2 2559.05,3681.1 r0 top
T11 "Test Point TH" "Test Point TH"#2 2622.05,3641.73 r270 top
T12 "Test Point TH" "Test Point TH"#2 2622.05,3720.47 r270 top
T13 "Test Point TH" "Test Point TH"#2 2559.05,3602.36 r270 top
T14 "TP" Testpoint1 2755.91,3527.56 r90 bottom
T15 "TP" Testpoint1 2818.9,3311.02 r90 top
T16 "TP" Testpoint1 2933.07,3507.87 r90 top
T17 "TP" Testpoint1 3349.41,3806.1 r90 top
T18 "TP" Testpoint1 3330.71,3649.61 r90 bottom
T19 "TP" Testpoint1 3677.17,3669.29 r90 top
T20 "TP" Testpoint1 3645.67,3791.34 r90 top
T21 "TP" Testpoint1 2870.08,2987.2 r90 top
T23 "TP" Testpoint1 3224.41,2972.44 r90 top
T24 "TP" Testpoint1 3070.87,3547.24 r90 bottom
T25 "TP" Testpoint1 3437.01,3748.03 r90 top
T26 "TP" Testpoint1 2976.38,3582.68 r90 bottom
T27 "TP" Testpoint1 3362.2,3881.89 r90 top
T28 "TP" Testpoint1 3291.34,3700.79 r90 top
T29 "TP" Testpoint1 3204.72,3795.28 r90 bottom
TP1 "Test Point TH" "Test Point TH"#3 3070.87,3385.83 r90 bottom
U1 "TP4054" "DBV0005A IPC-C" 2783.46,2905.51 r90 top
U2 "TPS63020DSJR" FP-DSJ0014A-MFG 3401.57,3484.25 r0 top
U3 "TPS2117DRLR" "DRL0008A IPC-C" 3452.76,2893.7 r225 bottom
U4 "W25Q256JVEIQ" "8-Pad WSON 8x6-mm IPC-C" 3531.5,3724.41 r180 bottom
U5 "THVD1426DRLR" "DRL0008A IPC-C" 2720.47,3374.02 r180 top
U6 "PT2041AD6" "DFN2X2-6L IPC-C" 2960.63,3456.69 r180 bottom
U7 "TLV8802DGKR" "DGK0008A IPC-C" 3070.87,2944.88 r0 top
U8 "SMD ERM Motor" Z3OC1T8219731 2523.62,2889.76 r270 top
U9 "STM32WB55CGU6" "UFQFPN48 IPC-C" 2964.57,3740.16 r180 top locked
U10 "MLPF-WB55-01E3" MLPF-WB55-01E3 2884.91,3959.72 r45 top
U11 "REF3025AIDBZR" SOT23-IPC_C 3000,3047.24 r180 bottom
U13 "BNO085" "LGA-28 BNO055 IPC-C" 3507.87,3940.94 r180 top
U14 "ICM-45686" "LGA-14 ICM-45686 IPC-C" 3291.34,3964.57 r180 top
Y1 "32.768KHz XTAL" "SMD3215-2P IPC-C" 3220.47,3578.74 r45 top
Y2 "32MHz 2016-4P" "SMD2016-4P IPC-C" 2720.47,3885.83 r270 top
Y5 "32.768KHz XTAL" "SMD3215-2P IPC-C" 3539.37,3783.46 r180 top

## Footprints (in the part's own frame and the unit in brackets; to place one, negate y for a bottom-side part, rotate by r counter-clockwise, add the part's x,y. Pads: shape width x height; smd on the part's side, far side on the other; paste and mask are expansions set on the pad)
"2P 2.54mm Open Header" [mm] "Pin Header, pitch 2.54 mm, THT, Vertical, single row, 2p"
  rect 1.6x1.6 hole 1.1: 1(-1.27,0)
  round 1.6 hole 1.1: 2(1.27,0)
  silkscreen extent -2.54,-1.27 2.54,1.27, body extent -2.54,-1.27 2.54,1.27, height 8.6
"8-Pad WSON 8x6-mm IPC-C" [mm] "SON, 8-Leads, Body 6.00x8.00mm, Pitch 1.27mm, Thermal Pad 4.30x3.40mm, IPC High Density"
  rect 0.85x0.45 smd: 1(-3.82,1.905) 2(-3.82,0.635) 3(-3.82,-0.635) 4(-3.82,-1.905) 5(3.82,-1.905) 6(3.82,-0.635) 7(3.82,0.635) 8(3.82,1.905)
  rect 3.4x4.3 smd paste-1.7: 9(0,0)
  silkscreen extent -4.65,-3.2 4.2,3.25, body extent -4.05,-3.05 4.05,3.05, height 0.8
"0402 IPC CLASS B RESISTOR" [mm] "Chip Resistor, 2-Leads, Body 1.00x0.50mm, IPC Medium Density"
  rect 0.55x0.55 smd mask+0.051: 1(-0.475,0) 2(0.475,0)
  silkscreen extent -0.05,-0.28 0.05,0.28, body extent -0.55,-0.28 0.55,0.28, height 0.4
"0402 IPC CLASS C CAPACITOR" [mm] "MLCC, 2-Leads, Body 1.00x0.50mm, IPC High Density"
  rect 0.45x0.45 smd mask+0.051: 1(-0.425,0) 2(0.425,0)
  silkscreen extent -0.05,-0.28 0.05,0.28, body extent -0.5,-0.25 0.5,0.25, height 0.7
"0402 IPC Class C Capacitor" [mm] "MLCC, 2-Leads, Body 1.00x0.50mm, IPC High Density"
  rect 0.45x0.45 smd mask+0.051: 1(-0.425,0) 2(0.425,0)
  silkscreen extent -0.05,-0.28 0.05,0.28, body extent -0.5,-0.25 0.5,0.25, height 0.7
"0402 IPC CLASS C FERRITE BEAD" [mm]
  rect 0.45x0.45 smd mask+0.051: 1(-0.425,0) 2(0.425,0)
  silkscreen extent -0.05,-0.28 0.05,0.28, body extent -0.5,-0.25 0.5,0.25, height 0.5
"0402 IPC CLASS C RESISTOR" [mm]
  rect 0.45x0.45 smd mask+0.051: 1(-0.425,0) 2(0.425,0)
  silkscreen extent -0.05,-0.28 0.05,0.28, body extent -0.55,-0.28 0.55,0.28, height 0.4
"0603 IPC CLASS C CAPACITOR" [mm] "MLCC, 2-Leads, Body 1.60x0.80mm, IPC High Density"
  rect 0.75x0.8 smd mask+0.051: 1(-0.625,0) 2(0.625,0)
  silkscreen extent -0.1,-0.45 0.1,0.45, body extent -0.8,-0.4 0.8,0.4, height 0.9
"0603 IPC CLASS C FERRITE BEAD" [mm] "Ferrite Bead, 2-Leads, Body 1.60x0.80mm, IPC High Density"
  rect 0.75x0.8 smd mask+0.051: 1(-0.625,0) 2(0.625,0)
  silkscreen extent -0.1,-0.45 0.1,0.45, body extent -0.8,-0.4 0.8,0.4, height 0.5
"0603 IPC CLASS C INDUCTOR" [mm] "Inductor, 2-Leads, Body 1.60x0.80mm, IPC High Density"
  rect 0.75x0.8 smd mask+0.051: 1(-0.625,0) 2(0.625,0)
  silkscreen extent -0.1,-0.45 0.1,0.45, body extent -0.8,-0.4 0.8,0.4, height 0.5
"0603 IPC CLASS C RESISTOR" [mm] "Chip Resistor, 2-Leads, Body 1.60x0.80mm, IPC High Density"
  rect 0.75x0.8 smd mask+0.051: 1(-0.625,0) 2(0.625,0)
  silkscreen extent -0.1,-0.45 0.1,0.45, body extent -0.85,-0.45 0.85,0.45, height 0.55
"1008 Inductor IPC-C" [mm] "Chip Inductor, 2-Leads, Body 2.50x2.00mm, IPC High Density"
  rect 1.03x2.12 smd: 1(-0.985,0) 2(0.985,0)
  silkscreen extent -0.1,-0.96 0.1,0.96, body extent -1.35,-1.1 1.35,1.1, height 1.2
"2450AT18B100E IPC-C" [mm] "Chip Diode, 2-Leads, Body 3.20x1.60mm, IPC High Density"
  rect 1.15x1.7 smd: 1(-1.275,0) 2(1.275,0)
  silkscreen extent -2.11,-0.75 0.3,1.11, body extent -1.6,-0.8 1.6,0.8, height 1.4
"DBV0005A IPC-C" [mm]
  rect 0.8x0.55 smd paste+0 mask+0.051: 1(-1.275,0.95) 2(-1.275,0) 3(-1.275,-0.95) 4(1.275,-0.95) 5(1.275,0.95)
  silkscreen extent -1.63,-1.55 0.38,1.55, body extent -1.4,-1.45 1.4,1.45, height 1.2
"DFN2X2-6L IPC-C" [mm] "SON, 6-Leads, Body 2.00x2.00mm, Pitch 0.65mm, Thermal Pad 1.30x0.77mm, IPC High Density"
  rect 0.65x0.35 smd mask+0.051: 1(-0.91,0.65) 2(-0.91,0) 3(-0.91,-0.65) 4(0.91,-0.65) 5(0.91,0) 6(0.91,0.65)
  rect 0.77x1.3 smd mask+0.051: 7(0,0)
  silkscreen extent -1.48,-1.17 1.02,1.22, body extent -1.03,-1.02 1.03,1.02, height 0.8
"DGK0008A IPC-C" [mm] "TSOP, 8-Leads, Body 3.00x3.00mm, Pitch 0.65mm, IPC High Density"
  oval 1.15x0.43 smd mask+0.051: 1(-2.125,0.975) 2(-2.125,0.325) 3(-2.125,-0.325) 4(-2.125,-0.975) 5(2.125,-0.975) 6(2.125,-0.325) 7(2.125,0.325) 8(2.125,0.975)
  silkscreen extent -2.25,-1.55 1.15,1.87, body extent -2.45,-1.55 2.45,1.55, height 1.1
"DPY0002A IPC-C" [mm] "X1SON, 2-Leads, Body 0.60x1.00mm, Pitch 0.65mm, IPC High Density"
  rect 0.25x0.5 smd mask+0.051: 1(-0.325,0) 2(0.325,0)
  silkscreen extent -0.6,0.53 -0.5,0.62, body extent -0.5,-0.3 0.5,0.3, height 0.45
"DRL0008A IPC-C" [mm] "TSSOP, 8-Leads, Body 2.10x1.20mm, Pitch 0.50mm, IPC High Density"
  oval 0.5x0.25 smd mask+0.051: 1(-0.7,0.75) 2(-0.7,0.25) 3(-0.7,-0.25) 4(-0.7,-0.75) 5(0.7,-0.75) 6(0.7,-0.25) 7(0.7,0.25) 8(0.7,0.75)
  silkscreen extent -0.97,-1.1 0.25,1.55, body extent -0.8,-1.05 0.8,1.05, height 0.6
"DRV0006A IPC-C" [mm] "SON, 6-Leads, Body 2.00x2.00mm, Pitch 0.65mm, Thermal Pad 1.60x0.89mm, IPC High Density"
  rect 0.6x0.3 smd mask+0.051: 1(-0.945,0.65) 2(-0.945,0) 3(-0.945,-0.65) 4(0.945,-0.65) 5(0.945,0) 6(0.945,0.65)
  rect 0.89x1.6 smd mask+0.051: 7(0,0)
  silkscreen extent -1.5,-1.2 1.05,1.25, body extent -1.05,-1.05 1.05,1.05, height 0.8
FP-DSJ0014A-MFG [mm]
  rrect100% 0.6x0.24 smd paste+0 mask+0: 1(-1.4,1.5) 2(-1.4,1) 3(-1.4,0.5) 4(-1.4,0) 5(-1.4,-0.5) 6(-1.4,-1) 7(-1.4,-1.5) 8(1.4,-1.5) 9(1.4,-1) 10(1.4,-0.5) 11(1.4,0) 12(1.4,0.5) 13(1.4,1) 14(1.4,1.5)
  round 1.422 smd paste-1000 mask+0: 15(0,0)
  SIG/GND1 region: -0.79,2.2 -0.59,2.2 -0.59,1.425 -0.33,1.425 -0.33,2.2 -0.13,2.2 -0.13,1.425 0.13,1.425 0.13,2.2 0.33,2.2 0.33,1.425 0.59,1.425 0.59,2.2 0.79,2.2 0.79,-2.2 0.59,-2.2 0.59,-1.425 0.33,-1.425 0.33,-2.2 0.13,-2.2 0.13,-1.425 -0.13,-1.425 -0.13,-2.2 -0.33,-2.2 -0.33,-1.425 -0.59,-1.425 -0.59,-2.2 -0.79,-2.2 -0.79,2.2
  silkscreen extent -2.25,-2.07 1.58,2.37, body extent -1.5,-2 1.5,2, height 1
FP-SOT23-IPC_C [mm]
  rect 1.055x0.522 smd paste+0 mask+0.051: 1(-0.875,0.95)
  rrect100% 1.055x0.522 smd paste+0 mask+0.051: 2(-0.875,-0.95) 3(0.875,0)
  silkscreen extent 0,-1.45 0.65,1.45, body extent -1.15,-1.45 1.15,1.45, height 1.1
JST-GH-04P-RA [mm] "-25℃~+85℃ 1 1.25mm 1A 1x4P 4 4.25mm 4P 50V 8.25mm Auxiliary Solder Pin GH LCP Phosphor bronze Surface Mount, Right Angle Tin UL94V-0 SMD,P=1.25mm,Surface Mount，Right Angle Wire To Board Connector ROHS"
  rect 0.6x1.7 smd: 1(-1.875,0.2) 2(-0.625,0.2) 3(0.625,0.2) 4(1.875,0.2)
  rect 1x2.7 smd: 5(-3.725,-3) 6(3.725,-3)
  silkscreen extent -4.13,-4.25 4.13,0, body extent -4.12,-4.13 4.13,0.72, height 4.45
"LGA-14 ICM-45686 IPC-C" [mm] "PQFN, 14-Leads, Body 3.00x2.50mm, Pitch 0.50mm, IPC High Density"
  oval 0.5x0.25 smd mask+0.051: 1(-1.15,0.75) 2(-1.15,0.25) 3(-1.15,-0.25) 4(-1.15,-0.75) 8(1.15,-0.75) 9(1.15,-0.25) 10(1.15,0.25) 11(1.15,0.75)
  oval 0.25x0.5 smd mask+0.051: 5(-0.5,-0.9) 6(0,-0.9) 7(0.5,-0.9) 12(0.5,0.9) 13(0,0.9) 14(-0.5,0.9)
  silkscreen extent -2.2,1.1 -1.95,1.35, body extent -1.55,-1.3 1.55,1.3, height 0.86
"LGA-28 BNO055 IPC-C" [mm] "PQFN, 28-Leads, Body 5.20x3.80mm, Pitch 0.50mm, IPC High Density"
  oval 0.25x0.5 smd mask+0.051: 1(-2.25,1.55) 6(-2.25,-1.55) 7(-1.75,-1.55) 8(-1.25,-1.55) 9(-0.75,-1.55) 10(-0.25,-1.55) 11(0.25,-1.55) 12(0.75,-1.55) 13(1.25,-1.55) 14(1.75,-1.55) 15(2.25,-1.55) 20(2.25,1.55) 21(1.75,1.55) 22(1.25,1.55) 23(0.75,1.55) 24(0.25,1.55) 25(-0.25,1.55) 26(-0.75,1.55) 27(-1.25,1.55) 28(-1.75,1.55)
  oval 0.5x0.25 smd mask+0.051: 2(-2.25,0.75) 3(-2.25,0.25) 4(-2.25,-0.25) 5(-2.25,-0.75) 16(2.25,-0.75) 17(2.25,-0.25) 18(2.25,0.25) 19(2.25,0.75)
  silkscreen extent -3.43,1.68 -3.18,1.92, body extent -2.65,-1.95 2.65,1.95, height 1.18
MLPF-WB55-01E3 [mm] "Signal Conditioning 2.4 GHz Matched filter companion chip for STM32WB55Cx and STM32WB55Rx"
  rect 0.3x0.3 smd mask+0.051: A1(-0.25,0.587) A2(-0.25,0) A3(-0.25,-0.587) B1(0.25,0.587) B2(0.25,0) B3(0.25,-0.587)
  silkscreen extent -0.75,0.9 -0.65,1, body extent -0.5,-0.8 0.5,0.8, height 0.45
MLT-5020 [mm] "-20℃~+70℃ 100mA 2.5mm 2V~4V 3V 4kHz 5.2mm 5.2mm 75dB Electromagnetic Passive (Externally Driven) SMD,5x5mm Buzzers ROHS"
  rect 1.7x0.7 smd paste+0 mask+0.05: 1(-2.3,-1.75) 2(2.3,-1.75) 3(-2.3,1.75)
  silkscreen extent -2.6,-2.65 2.6,2.63, body extent -2.6,-2.64 2.6,2.63, height 2.01
"NH-B1515RGBA-HF IPC-C" [mm] "SON, 4-Leads, Body 1.50x1.60mm, Pitch 0.70mm, IPC High Density"
  rect 0.8x0.35 smd: 1(-0.645,0.35) 2(0.645,0.35) 3(0.645,-0.35) 4(-0.645,-0.35)
  silkscreen extent -1.45,-0.95 1,1, body extent -0.8,-0.75 0.8,0.75, height 1
"SMD2016-4P IPC-C" [mm] "DFN, 4-Leads, Body 2.00x1.60mm, Pitch 1.30mm, IPC High Density"
  rect 0.7x0.6 smd: 1(-0.7,-0.55) 2(0.7,-0.55) 3(0.7,0.55) 4(-0.7,0.55)
  silkscreen extent -1.5,-0.9 -1.4,-0.8, body extent -1,-0.8 1,0.8, height 0.45
"SMD3215-2P IPC-C" [mm] "DFN, 2-Leads, Body 1.50x3.20mm, Pitch 2.45mm, IPC High Density"
  rect 0.8x1.55 smd: 1(-1.25,0) 2(1.25,0)
  silkscreen extent -1.7,1.15 -1.6,1.25, body extent -1.6,-0.75 1.6,0.75, height 0.8
"SOD882 IPC-C" [mm] "DFN, 2-Leads, Body 0.60x1.00mm, Pitch 0.65mm, IPC High Density"
  rect 0.3x0.5 smd mask+0.051: 1(-0.325,0) 2(0.325,0)
  silkscreen extent -0.85,-0.05 -0.75,0.05, body extent -0.55,-0.35 0.55,0.35, height 0.6
"SOD-323 IPC-C" [mm]
  rect 0.686x0.436 smd paste+0 mask+0.051: 1(-1.16,0)
  rrect100% 0.686x0.436 smd paste+0 mask+0.051: 2(1.16,0)
  silkscreen extent -1.51,-0.63 0.85,0.94, body extent -1.25,-0.63 1.25,0.63, height 1.1
SOT23-IPC_C [mm]
  rect 1.055x0.522 smd paste+0 mask+0.051: 1(-0.875,0.95)
  rrect100% 1.055x0.522 smd paste+0 mask+0.051: 2(-0.875,-0.95) 3(0.875,0)
  silkscreen extent 0,-1.45 0.65,1.45, body extent -1.15,-1.45 1.15,1.45, height 1.1
"SOT-23 IPC-C" [mm] "SOT23, 3-Leads, Body 2.90x2.60mm, Pitch 0.95mm, IPC High Density"
  rect 0.85x0.6 smd: D(1.25,0) G(-1.25,0.95) S(-1.25,-0.95)
  silkscreen extent -1.37,-1.55 0.82,1.92, body extent -1.5,-1.55 1.5,1.55, height 1.4
"Test Point TH"#1 [mm] "Through Hole Test Point"
  round 1.5 hole 0.85 mask+0: 0(0,0)
"Test Point TH"#2 [mm] "Through Hole Test Point"
  round 1.2 hole 0.85 mask+0: 0(0,0)
"Test Point TH"#3 [mm] "Through Hole Test Point"
  round 2 hole 1 mask+0: 0(0,0)
Testpoint1 [mm] "SMD test point"
  round 1 smd: 0(0,0)
TS-1127-C [mm] "None Without 50mA 4.5mm 100000 Times 260gf 12V 4.5mm 1.5mm Round Button Standing paste SPST SMD Tactile Switches ROHS"
  rect 1.3x1.3 smd: 1(-2.779,1.464) 2(2.721,1.464) 3(-2.779,-1.536) 4(2.721,-1.536)
  silkscreen extent -2.43,-2.14 2.37,2.06, body extent -3,-2.25 3,2.25, height 1.6
"UFQFPN48 IPC-C" [mm] "QFN, 48-Leads, Body 7.00x7.00mm, Pitch 0.50mm, Thermal Pad 5.60x5.60mm, IPC High Density"
  oval 0.75x0.25 smd mask+0.051: 1(-3.375,2.75) 2(-3.375,2.25) 3(-3.375,1.75) 4(-3.375,1.25) 5(-3.375,0.75) 6(-3.375,0.25) 7(-3.375,-0.25) 8(-3.375,-0.75) 9(-3.375,-1.25) 10(-3.375,-1.75) 11(-3.375,-2.25) 12(-3.375,-2.75) 25(3.375,-2.75) 26(3.375,-2.25) 27(3.375,-1.75) 28(3.375,-1.25) 29(3.375,-0.75) 30(3.375,-0.25) 31(3.375,0.25) 32(3.375,0.75) 33(3.375,1.25) 34(3.375,1.75) 35(3.375,2.25) 36(3.375,2.75)
  oval 0.25x0.75 smd mask+0.051: 13(-2.75,-3.375) 14(-2.25,-3.375) 15(-1.75,-3.375) 16(-1.25,-3.375) 17(-0.75,-3.375) 18(-0.25,-3.375) 19(0.25,-3.375) 20(0.75,-3.375) 21(1.25,-3.375) 22(1.75,-3.375) 23(2.25,-3.375) 24(2.75,-3.375) 37(2.75,3.375) 38(2.25,3.375) 39(1.75,3.375) 40(1.25,3.375) 41(0.75,3.375) 42(0.25,3.375) 43(-0.25,3.375) 44(-0.75,3.375) 45(-1.25,3.375) 46(-1.75,3.375) 47(-2.25,3.375) 48(-2.75,3.375)
  rect 5.6x5.6 smd mask+0.051: 49(0,0)
  silkscreen extent -4.08,-3.7 3.7,4.25, body extent -3.55,-3.55 3.55,3.55, height 0.6
VALCON_CSP-USC16-TR [mm]
  rect 0.3x1.14 smd: A1(-3.35,0) A4(-2.55,0) A5(-1.25,0) A6(-0.25,0) A7(0.25,0) A8(1.25,0) A9(2.55,0) A12(3.35,0) B1(3.05,0) B4(2.25,0) B5(1.75,0) B6(0.75,0) B7(-0.75,0) B8(-1.75,0) B9(-2.25,0) B12(-3.05,0)
  oval 1x2 hole 0.65 slot 1.72 at 90 deg: S1(-4.325,-0.59) S2(4.325,-0.59)
  oval 0.9x1.8 hole 0.65 slot 1.4 at 90 deg: S3(-4.325,-4.77) S4(4.325,-4.77)
  round 0.65 hole 0.65 unplated: ""(-2.89,-1.07) ""(2.89,-1.07)
  silkscreen extent -5.67,-6.41 4.47,0.1, body extent -4.47,-7.35 4.47,0.4, height 3.26
Z3OC1T8219731 [mm] "ERM Motor"
  rect 1.3x1.1 smd paste+0 mask+0.05: 1(3.05,1.6) 2(3.05,-1.6)
  oval 3.96x2.04 smd: 3(0,0)
  SIG/GND1 region: -2.5,1.7 1.8,1.7 1.8,0.5 3.3,0.5 3.3,-0.5 1.8,-0.5 1.8,-1.7 -2.5,-1.7 -2.5,-1.3 -3.3,-1.3 -3.3,-0.3 -2.5,-0.3 -2.5,0.3 -3.3,0.3 -3.3,1.3 -2.5,1.3 -2.5,1.7
  silkscreen extent -6.7,-2.2 3.63,2.2, body extent -6.7,-2.21 3.8,2.21, height 3.45

## Part data
C29: library part "Capacitor 0402"
C56 C57: library part "100nF 50V 0402 X7R"
D20: library part NH-B1515RGBA-HF
J1: library part "USB Type C"
L2: library part DFE252012F-1R0M=P2
L4 L6: library part SDCL1005C10NJTDF
L5: library part MGFL1608F100MT-LF
LS1: library part MLT-5020
R1 R20: library part "2K 1% 0402"
R2 R4 R5 R8 R9 R11 R16 R17 R24 R31 R34 R35 R37 R41 R43 R46 R47 R48 R59: library part "10k 1% 0402"
R3: library part "137K 1% 0402"
R6 R7 R12 R13: library part "22R 1% 0402"
R10: library part "30.9K 1%  0402"
R14 R15 R21 R30 R33 R60 R61: library part "5.1K 1% 0402"
R18 R22 R23 R36 R42 R44 R45 R49 R58: library part "0R 1% 0402"
R19: library part "120R 1% 0402"
R28 R29 R32: library part "1K 1% 0402"
R50 R52 R56 R57: library part "2.43K 1% 0402"
S1: library part TS-1127-C
T3 T4 T5 T6 T14 T15 T16 T17 T18 T19 T20 T21 T23 T24 T25 T26 T27 T28 T29: library part Testpoint1
T7 T8: library part "Test Point TH"
U2: library part CMP-2000-07282-2
U8: library part Z3OC1T8219731
Y1 Y5: library part H31003271C2070CY

## Free pads (board coordinates)
  round 78.74 hole 78.74 unplated mask+4: ""(2464.57,3744.1) ""(3665.35,3153.54)

## Via types
v1: diameter 20, hole 12, SIG/GND1 to SIG/GND3, tented both sides, 484 vias
v2: diameter 19.68, hole 11.81, SIG/GND1 to SIG/GND3, tented both sides, 28 vias

## Nets (pads, with @x,y where several pads share a name; then routed paths per layer and width w, separated by ;. In a path a pad name is that pad's centre, name@x,y a point inside that pad or via, vN(x,y) a via of type N, cw(c..) or ccw(c..) an arc to the next point about the centre after c; other vN are vias at no path point)
2V5_Ref: C18.2 C19.1 R25.2 R26.2 T6.0 U11.2 | length 636.2
  SIG/GND1 w12: R25.2@2925.2,2823.82 2925.2,2881.89 2940.94,2897.64 v1(2940.94,2940.94) ; v1(3259.84,2913.39) 3259.84,2885.83 3272.64,2873.03 R26.2@3272.64,2818.9
  SIG/GND3 w12: v1(2940.94,2940.94) 2968.5,2968.5 2968.5,2992.13 2986.22,3009.84 U11.2@3034.47,3009.84 ; C19.1@3114.17,2999.02 3193.9,2999.02 3259.84,2933.07 v1(3259.84,2913.39)
  SIG/GND3 w20: U11.2@3034.47,3009.84 3034.58,3009.73 3057.2,3009.73 3067.91,2999.02 C18.2@3078.74,2999.02 C19.1@3114.17,2999.02
3V3_BNO: C80.1 C81.1 C82.1 FB14.2 R41.1 R43.2 R44.2 R45.2 R46.2 R50.2 R52.2 R56.1 R57.1 U13.3 U13.28 | length 765.8
  SIG/GND1 w10: U13.3@3596.46,3931.1 3596.54,3931.02 3636.89,3931.02 C81.1@3637.8,3930.12
  SIG/GND1 w12: v1(3572.36,3902.11) 3576.77,3897.7 U13.28@3576.77,3879.92
  SIG/GND1 w20: R57.1@3449.8,3803.15 v1(3449.8,3820.87) R56.1@3449.8,3838.58 ; C81.1@3637.8,3930.12 v1(3673.23,3930.12) ; R41.1@3670.28,3964.57 3670.28,3933.07 v1(3673.23,3930.12) ; v1(3708.66,3930.12) v1(3673.23,3930.12)
  SIG/GND3 w20: v1(3449.8,3820.87) 3449.8,3843.5 3511.81,3905.51 3511.81,3929.13 ; R46.2@3453.74,3933.07 R52.2@3453.74,3968.5 ; R50.2@3453.74,4003.94 R52.2@3453.74,3968.5 ; R44.2@3562.01,4003.94 R45.2@3562.01,3968.5 3562.01,3945.87 ; C82.1@3577.76,3897.64 3577.76,3930.12 ; v1(3673.23,3930.12) 3577.76,3930.12 ; R52.2@3453.74,3968.5 ccw(c3454.72,3968.5) 3454.72,3967.52 R43.2@3496.06,3967.52 3496.06,3944.88 3511.81,3929.13 ; 3511.81,3929.13 3545.28,3929.13 3562.01,3945.87 ; 3562.01,3945.87 3577.76,3930.12
3V3_BZ: C34.1 C35.1 D22.1 FB7.2 LS1.1
  other v1: 2677.17,3096.85 2693.9,3133.86 2693.9,3169.29
3V3_EN: C25.2 D3.1 D4.1 D5.1 R5.1 T14.0 U2.12 | length 1040.9
  SIG/GND1 w10: U2.12@3456.69,3503.94 v1(3474.41,3503.94)
  SIG/GND2 w12: v1(2834.65,3482.68) 2858.27,3459.06 2858.27,3444.88 2874.02,3429.13 2952.76,3429.13 2976.38,3452.76 3133.86,3452.76 3236.22,3350.39 3421.26,3350.39 3456.69,3385.83 3456.69,3486.22 v1(3474.41,3503.94)
  SIG/GND3 w12: T14.0@2755.91,3527.56 D3.1@2755.91,3482.68 v1(2834.65,3482.68)
  SIG/GND3 w20: v1(2834.65,3482.68) C25.2@2834.65,3519.68 ; R5.1@3456.69,3503.94 R5.1@3457.68,3503.94 v1(3474.41,3503.94)
3V3_ERM: C32.1 C33.1 D21.1 FB6.2 U8.1
  other v1: 2569.29,2771.65 2605.31,2783.46 2625.98,2817.91
3V3_FB: R8.2 R9.2 U2.3 | length 62
  SIG/GND1 w10: v1(3328.74,3503.94) U2.3@3346.46,3503.94
  SIG/GND3 w20: v1(3328.74,3503.94) R9.2@3342.52,3503.94 R8.2@3342.52,3473.43
3V3_FLASH: C4.1 C5.1 FB1.2 U4.3 U4.7 U4.8 | length 486.3
  SIG/GND3 w8: U4.7@3381.1,3749.41 3412.01,3749.41 3425.2,3736.22 3425.2,3633.86 3452.76,3606.3 3606.3,3606.3 3633.86,3633.86 3633.86,3681.1 3652.17,3699.41 U4.3@3681.89,3699.41
3V3_FLX: C6.1 C8.1 FB3.2 U7.8 | length 119.3
  SIG/GND1 w20: U7.8@3154.53,2983.27 C8.1@3154.53,3031.5 ; C6.1@3154.53,3066.93 C8.1@3154.53,3031.5 ; FB3.2@3188.98,3034.45 3157.48,3034.45 C8.1@3154.53,3031.5
3V3_ICM: C86.1 C87.1 C88.1 FB15.1 R59.1 R60.1 R61.1 U14.5 U14.8 U14.12 | length 85.2
  SIG/GND1 w8: v1(3311.02,3987.2) U14.5@3311.02,4000
  SIG/GND1 w12: v1(3223.43,3994.09) U14.8@3246.06,3994.09 ; U14.12@3271.65,3929.13 3271.65,3937.23 3275.59,3941.16 v1(3275.59,3957.68)
  SIG/GND3 w12: v1(3223.43,3994.09) 3225.59,3994.09 3229.62,3990.06 3237.3,3990.06 C88.1@3240.16,3987.2
3V3_main: C9.1 C10.2 C11.1 C12.1 C13.1 C36.1 C39.1 C40.1 C51.1 D20.2 FB1.1 FB3.1 FB4.1 FB5.1 FB6.1 FB7.1 FB8.2 FB9.2 FB10.1 FB14.1 FB15.2 R3.1 R8.1 R16.2 R17.2 R35.2 R36.2 T4.0 U2.4 U2.5 U9.40 | length 952.7
  SIG/GND1 w12: v1(2712.6,3515.75) 2744.09,3515.75 2756.89,3502.95 R16.2@2756.89,3476.38 ; v1(2915.35,3577.76) U9.40@2915.35,3607.28 ; D20.2@3096.26,3175.2 v1(3149.61,3175.2)
  SIG/GND1 w20: R17.2@2756.89,3440.94 R16.2@2756.89,3476.38 ; R36.2@3191.93,3690.95 v1(3218.5,3690.95) ; v1(3236.22,3744.1) v1(3271.65,3744.1) ; v1(3708.66,3874.02) v1(3708.66,3896.65)
  SIG/GND3 w20: v1(2618.11,3185.04) 2590.55,3157.48 2590.55,2937.01 2677.17,2850.39 2677.17,2795.28 2665.35,2783.46 FB6.1@2638.78,2783.46 ; C39.1@2777.56,3902.56 C40.1@2809.05,3902.56 v1(2809.05,3933.07) ; v1(3147.64,3125.98) 3147.64,3112.2 3149.61,3110.24 v1(3149.61,3095.47) ; v1(3196.85,3909.45) 3211.61,3924.21 FB15.2@3240.16,3924.21
  SIG/GND3 w25: v1(2618.11,3185.04) v1(2637.8,3204.72) FB7.1@2660.43,3204.72
  other v1: 2696.85,2890.75 3188.98,3067.91 2657.48,3305.12 3244.09,3437.99 3271.65,3437.99 3299.21,3437.99 3232.28,3459.65 3259.84,3459.65 3287.4,3459.65 3244.09,3479.33 3271.65,3479.33 3299.21,3479.33 2685.04,3608.27 3306.1,3874.02 2970.47,3969.49
3V3_MCU2: C41.1 C42.1 C43.1 C44.1 C45.1 C46.1 FB10.2 U9.1 U9.20 U9.34 U9.35 U9.48 | length 673.1
  SIG/GND1 w12: U9.20@2935.04,3873.03 v1(2935.04,3906.5)
  PWR w25: v1(2935.04,3906.5) 2825.79,3797.25 v1(2825.79,3661.42) 2869.91,3661.42 2917.17,3614.15 v1(3090.57,3614.15)
  SIG/GND3 w20: v1(2935.04,3906.5) C41.1@2970.47,3906.5 FB10.2@2970.47,3936.02
  other v1: 2791.34,3639.76 2798.23,3661.42
3V3_RS485: C26.1 C27.1 FB4.2 U5.8 | length 107.7
  SIG/GND1 w12: C27.1@2691.93,3307.09 2692.91,3308.07 U5.8@2692.91,3344.49
  SIG/GND1 w20: FB4.2@2657.48,3271.65 C26.1@2691.93,3271.65 C27.1@2691.93,3307.09
5V_in: C1.2 D2.4 D2.5 D2.6 D3.2 D6.1 D8.1 J1.A4 J1.A9 J1.B4 J1.B9 P2.1 P3.1 R10.2 T3.0 U1.5 U3.3 U3.5 | length 2892.1
  SIG/GND1 w8: J1.B9@3362.32,2960.75 J1.B9@3366.5,2964.92 ; J1.B4@3491.77,3090.2 3495.95,3094.37 J1.A9@3500.12,3098.55
  SIG/GND1 w25: v1(2559.05,3459.65) 2487.2,3459.65 2448.82,3421.26 2448.82,3338.58 2535.43,3251.97 2535.43,3137.8 2625.98,3047.24 2625.98,2976.38 2646.65,2955.71 U1.5@2746.06,2955.71 2746.06,2957.28 2749.41,2960.63 2750.98,2960.63 2866.14,3075.79 2866.14,3216.54 2901.57,3251.97 3181.1,3251.97 T3.0@3248.03,3185.04 3248.03,3075.04 3282.71,3040.35 ; J1.B9@3362.32,2960.75 3282.71,3040.35 ; v1(3407.48,3173.23) 3407.48,3165.12 3282.71,3040.35 ; v1(3448.48,3160.32) 3467.52,3141.28 ; J1.A9@3495.95,3094.37 3467.52,3122.8 3467.52,3141.28 ; v1(3582.68,3312.01) 3582.68,3244.09 3479.86,3141.28 3467.52,3141.28
  SIG/GND3 w8: R10.2@3468.48,2811 3459.97,2819.52 3459.97,2847.52 U3.5@3454.15,2853.33 3468.5,2867.69 3468.5,2895.53 U3.3@3479.2,2906.23
  SIG/GND3 w12: v1(2582.68,3459.65) 2603.35,3459.65 2671.65,3391.34 D3.2@2755.91,3391.34 ; U3.3@3479.2,2906.23 3488.68,2915.71
  SIG/GND3 w20: 3488.68,2915.71 3496.06,2923.09 3496.06,2948.82
  SIG/GND3 w35: v1(3425.58,3155.13) 3425.58,3066.55 3496.06,2996.06 3496.06,2948.82
  other v1: 2747.05,2956.69 3430.39,3178.42 3412.29,3196.51 3559.06,3312.01
BAT_SENS: C7.1 R2.1 R4.2 U9.19 | length 1905.8
  SIG/GND1 w8: v1(2933.07,4015.75) 2933.07,3948.82 2958.15,3923.74 2958.15,3901.32 2954.72,3897.9 U9.19@2954.72,3873.03
  SIG/GND3 w10: R2.1@2854.33,2875 R4.2@2854.33,2904.53 C7.1@2889.76,2904.53 2917.32,2932.09 2917.32,3086.61 2948.82,3118.11 3039.37,3118.11 3193,3271.74 3193,3494.26 3259.84,3561.11 3259.84,3688.98 3292.65,3721.79 3292.65,3754.59 3251.97,3795.28 3251.97,3850.39 3228.35,3874.02 3185.04,3874.02 3169.29,3889.76 3169.29,3929.13 3190.94,3950.79 3190.94,4013.78 3173.23,4031.5 2948.82,4031.5 v1(2933.07,4015.75)
BNO_INT: T26.0 U9.42 U13.14 | length 1255.9
  SIG/GND1 w6: U9.42@2954.72,3607.28 2954.72,3584.33 2968.5,3570.55 v1(2968.5,3537.15) ; v1(3377.95,4023.62) 3393.7,4023.62 3401.58,4031.5 3425.2,4031.5 3438.98,4017.72 U13.14@3438.98,4001.97
  SIG/GND2 w8: v1(2968.5,3537.15) 2993.84,3511.81 3145.67,3511.81 3307.09,3673.23 3464.57,3673.23 3523.62,3732.28 3523.62,3940.95 3440.95,4023.62 v1(3377.95,4023.62)
  SIG/GND3 w8: v1(2968.5,3537.15) 2968.5,3574.8 T26.0@2976.38,3582.68
BNO_RST: R43.1 U13.11 | length 49
  SIG/GND1 w8: U13.11@3498.03,4001.97 v1(3498.03,4025.59)
  SIG/GND3 w8: R43.1@3496.06,4000.98 3497.98,4002.9 3497.98,4025.54 v1(3498.03,4025.59)
BNO_SCL: R57.2 T25.0 U9.16 U13.19 | length 752.4
  SIG/GND1 w6: U13.19@3419.29,3911.42 3403.54,3911.42 3393.7,3901.57 3393.7,3811.02 3401.57,3803.15 R57.2@3416.34,3803.15 3416.34,3790.35 3413.39,3787.4 v1(3413.39,3771.65) T25.0@3437.01,3748.03
  SIG/GND1 w8: U9.16@3013.78,3873.03 v1(3013.78,3895.67)
  SIG/GND2 w8: v1(3013.78,3895.67) 3055.12,3937.01 3133.86,3937.01 3200.79,3870.08 3200.79,3814.96 3216.54,3799.21 3342.52,3799.21 3370.08,3771.65 v1(3413.39,3771.65)
BNO_SDA: R56.2 T24.0 U9.44 U13.20 | length 854.3
  SIG/GND1 w6: U9.44@2994.09,3607.28 2994.09,3584.65 v1(3043.31,3535.43) ; v1(3416.34,3838.58) 3416.34,3857.28 3419.29,3860.24 U13.20@3419.29,3879.92
  SIG/GND2 w8: v1(3043.31,3535.43) 3145.67,3535.43 3300.17,3689.93 3331.66,3689.93 3366.14,3724.41 3456.69,3724.41 3476.38,3744.09 3476.38,3838.58 3460.63,3854.33 3432.09,3854.33 v1(3416.34,3838.58)
  SIG/GND3 w8: v1(3043.31,3535.43) 3045.6,3537.73 3052.86,3537.73 3062.38,3547.24 T24.0@3070.87,3547.24
Buzzer_PWM: R33.1 R34.2 T8.0 U9.37 | length 584.1
  SIG/GND1 w6: v1(2767.72,3574.8) 2783.46,3590.55 2826.77,3590.55 2843.51,3607.28 U9.37@2856.3,3607.28
  SIG/GND2 w8: v1(2767.72,3574.8) 2748.03,3555.12 2748.03,3295.28 T8.0@2779.53,3263.78
  SIG/GND3 w8: R33.1@2764.76,3149.61 R34.2@2794.29,3149.61 2794.29,3174.21 2779.53,3188.98 T8.0@2779.53,3263.78
CHRG_STAT: R3.2 U1.1 U9.10 | length 1447.2
  SIG/GND1 w8: U9.10@3097.44,3809.06 3097.79,3809.41 3112.56,3809.41 3118.11,3814.96 3133.86,3814.96 v1(3153.54,3834.65)
  SIG/GND1 w12: R3.2@2696.85,2857.28 2744.09,2857.28 U1.1@2746.06,2855.31 2746.06,2887.8 v1(2732.28,2901.57)
  SIG/GND3 w6: v1(2732.28,2901.57) 2755.91,2925.2 2803.15,2925.2 2822.83,2944.88 2822.83,3007.87 2862.2,3047.24 2862.2,3098.43 2925.2,3161.42 3015.75,3161.42 3145.67,3291.34 3145.67,3513.86 3173.23,3541.42 3173.23,3594.49 3086.61,3681.1 3086.61,3799.21 3122.05,3834.65 v1(3153.54,3834.65)
ERM_EN: R30.1 R31.2 T7.0 U9.36 | length 1195.3
  SIG/GND1 w6: v1(2641.73,3594.49) 2657.48,3594.49 2669.29,3582.68 2740.16,3582.68 2767.72,3610.24 2822.83,3610.24 2831.69,3619.09 U9.36@2831.69,3631.89
  SIG/GND3 w8: R30.1@2489.17,2968.5 R31.2@2518.7,2968.5 2518.7,3168.31 T7.0@2598.43,3248.03 2566.93,3279.53 2468.5,3279.53 2433.07,3314.96 2433.07,3507.87 2476.38,3551.18 2598.43,3551.18 v1(2641.73,3594.49)
FLASH_CLK: R6.1 U9.14 | length 72
  SIG/GND1 w5.04: R6.1@3031.5,3936.02 3053.15,3914.37 U9.14@3053.15,3873.03